# Altium PCB PCB1.PcbDoc
Units mm, origin at the board's own origin, x right, y up, seen from the top; angles counter-clockwise.
Board outline 106 x 106 mm, 4 copper layers (Top Layer, Layer 1, Layer 2, Bottom Layer), stack 2.276 mm thick; 85 components, 55 nets, 394 pads, 308 vias.
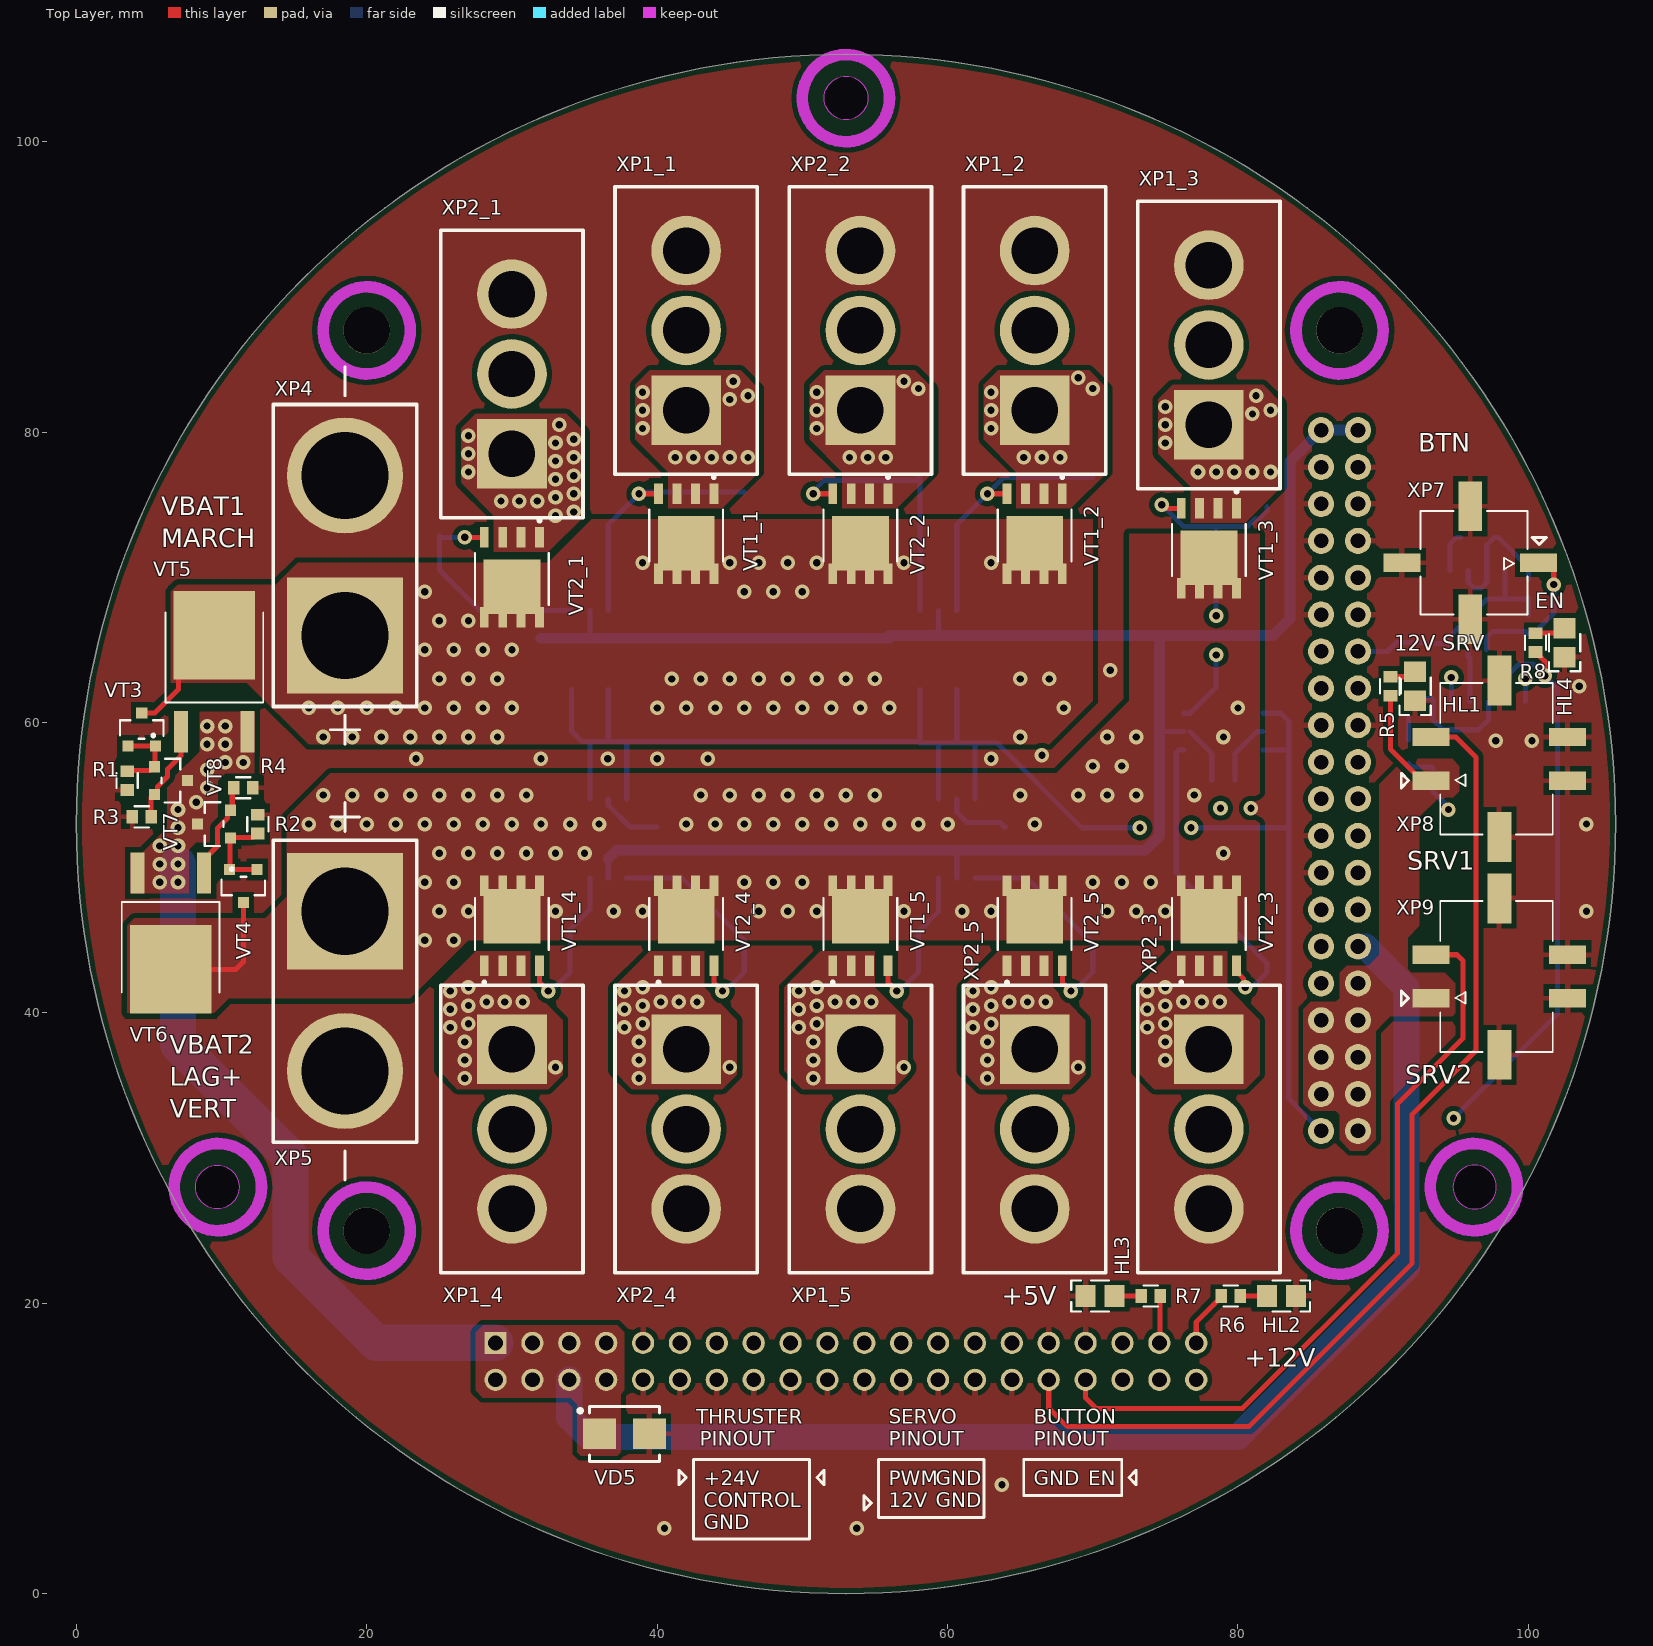
[diagram p0: Top Layer view]
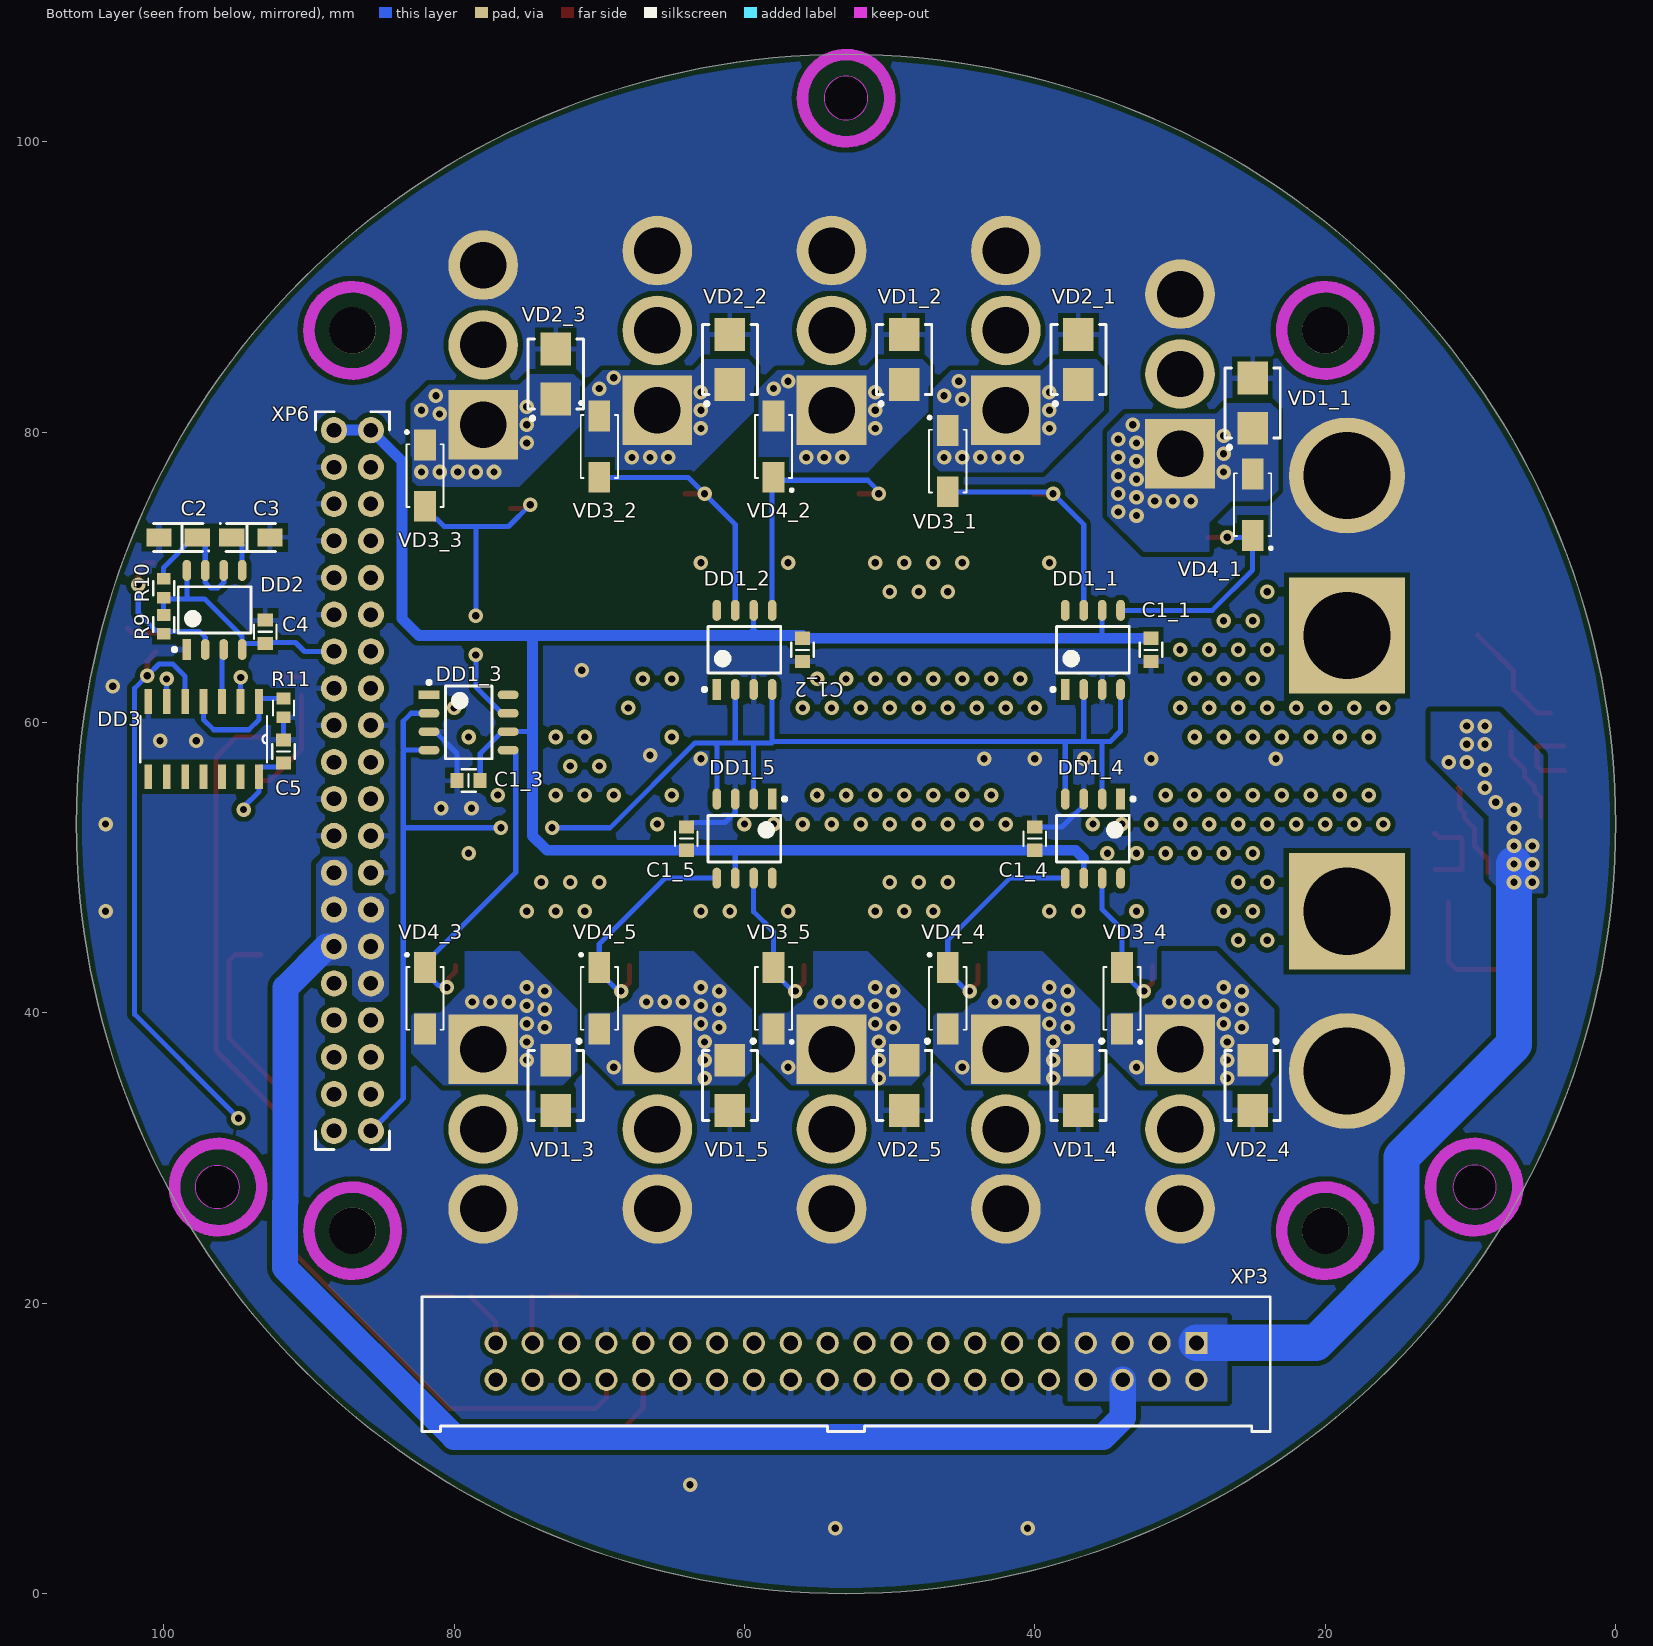
[diagram p1: Bottom Layer view, seen from below]
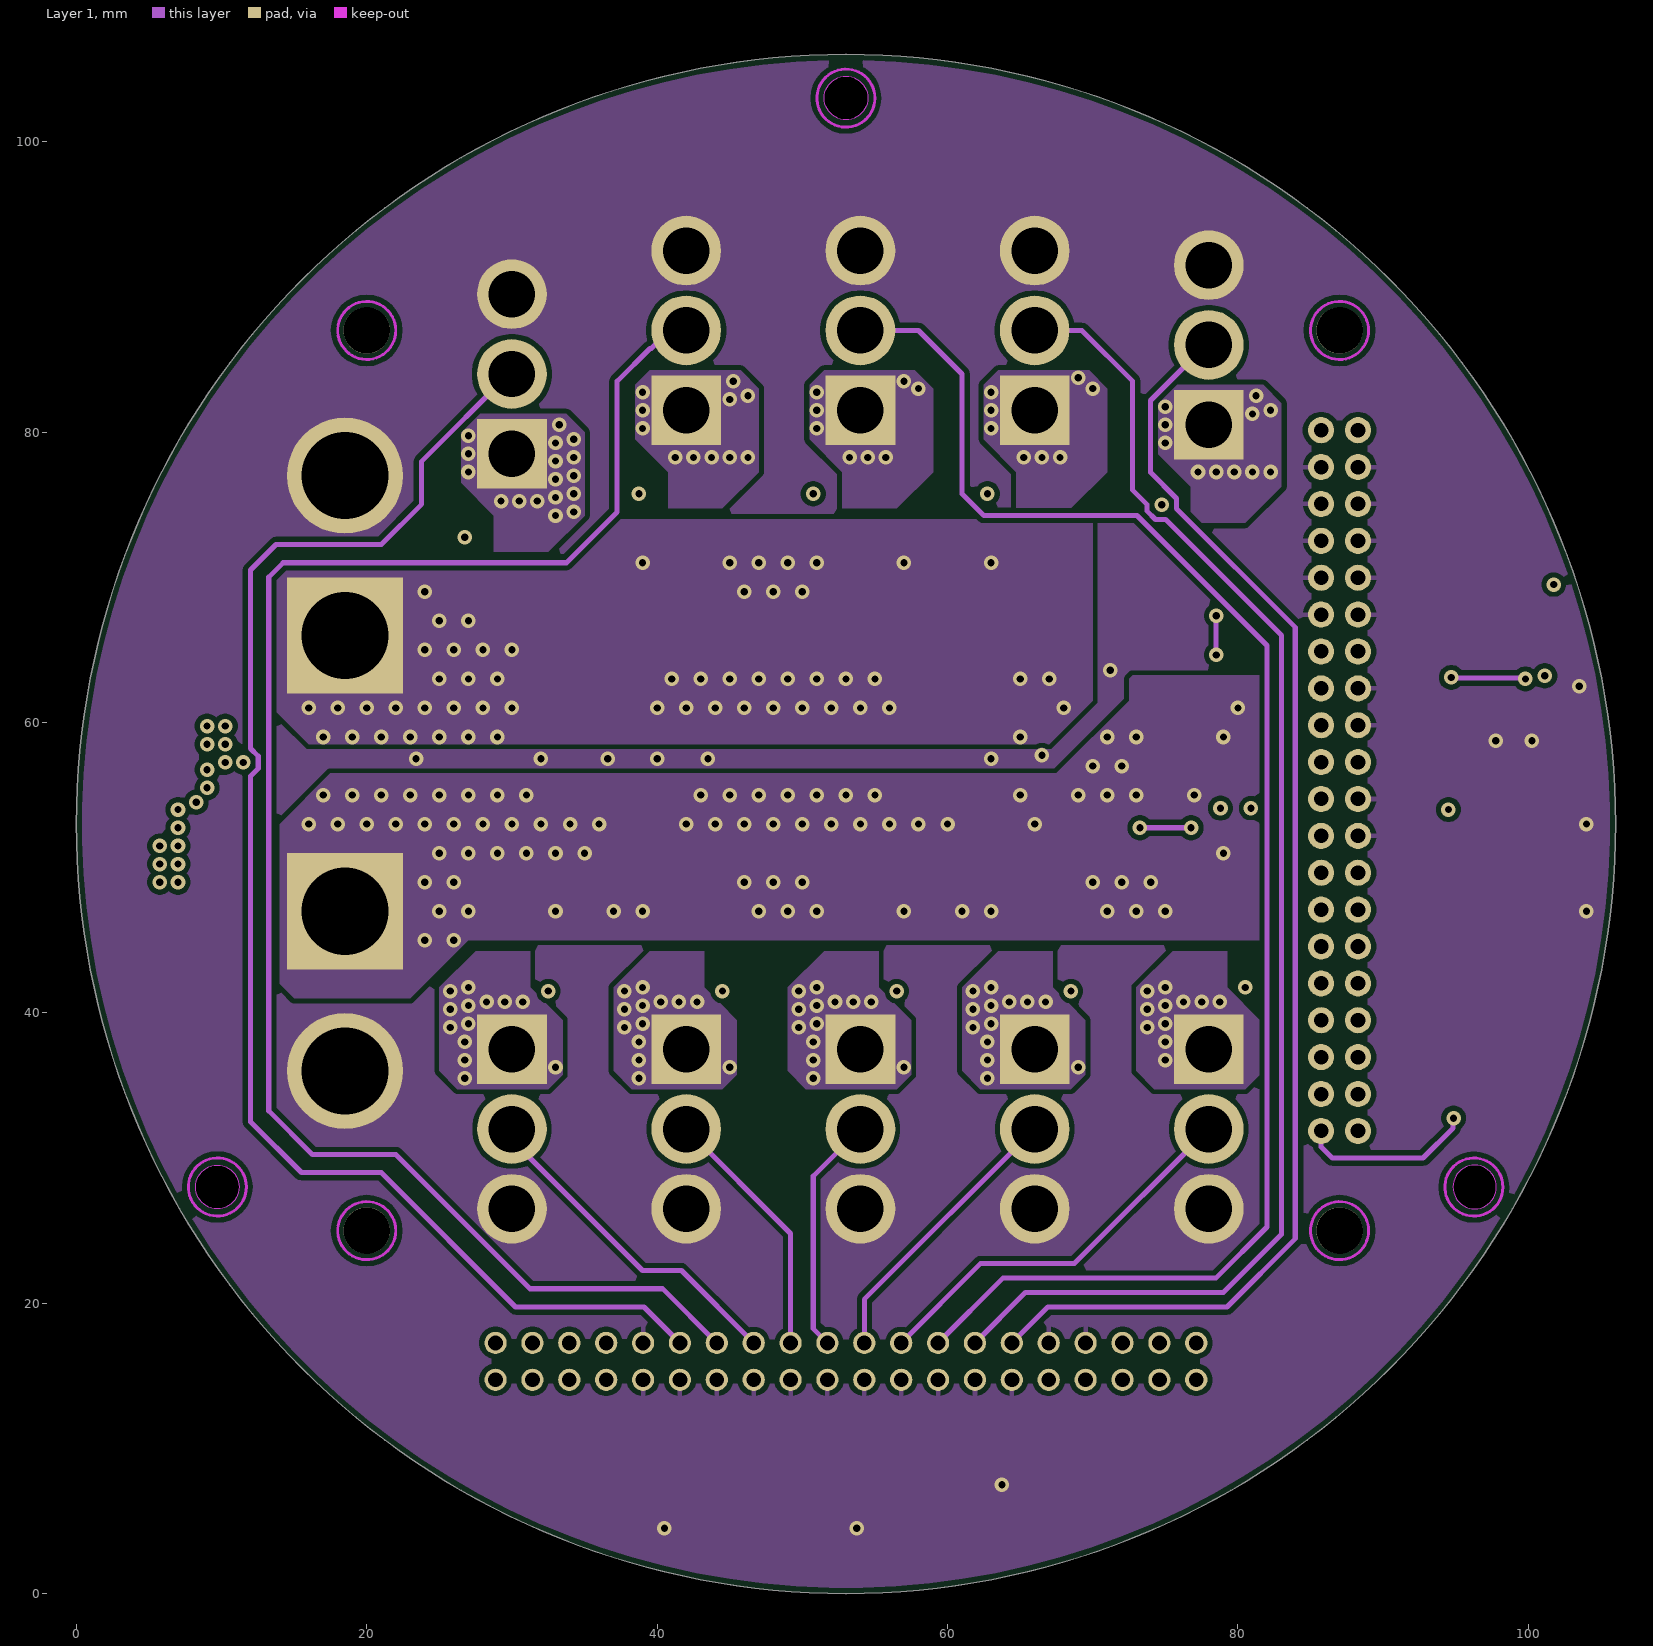
[diagram p2: Layer 1]
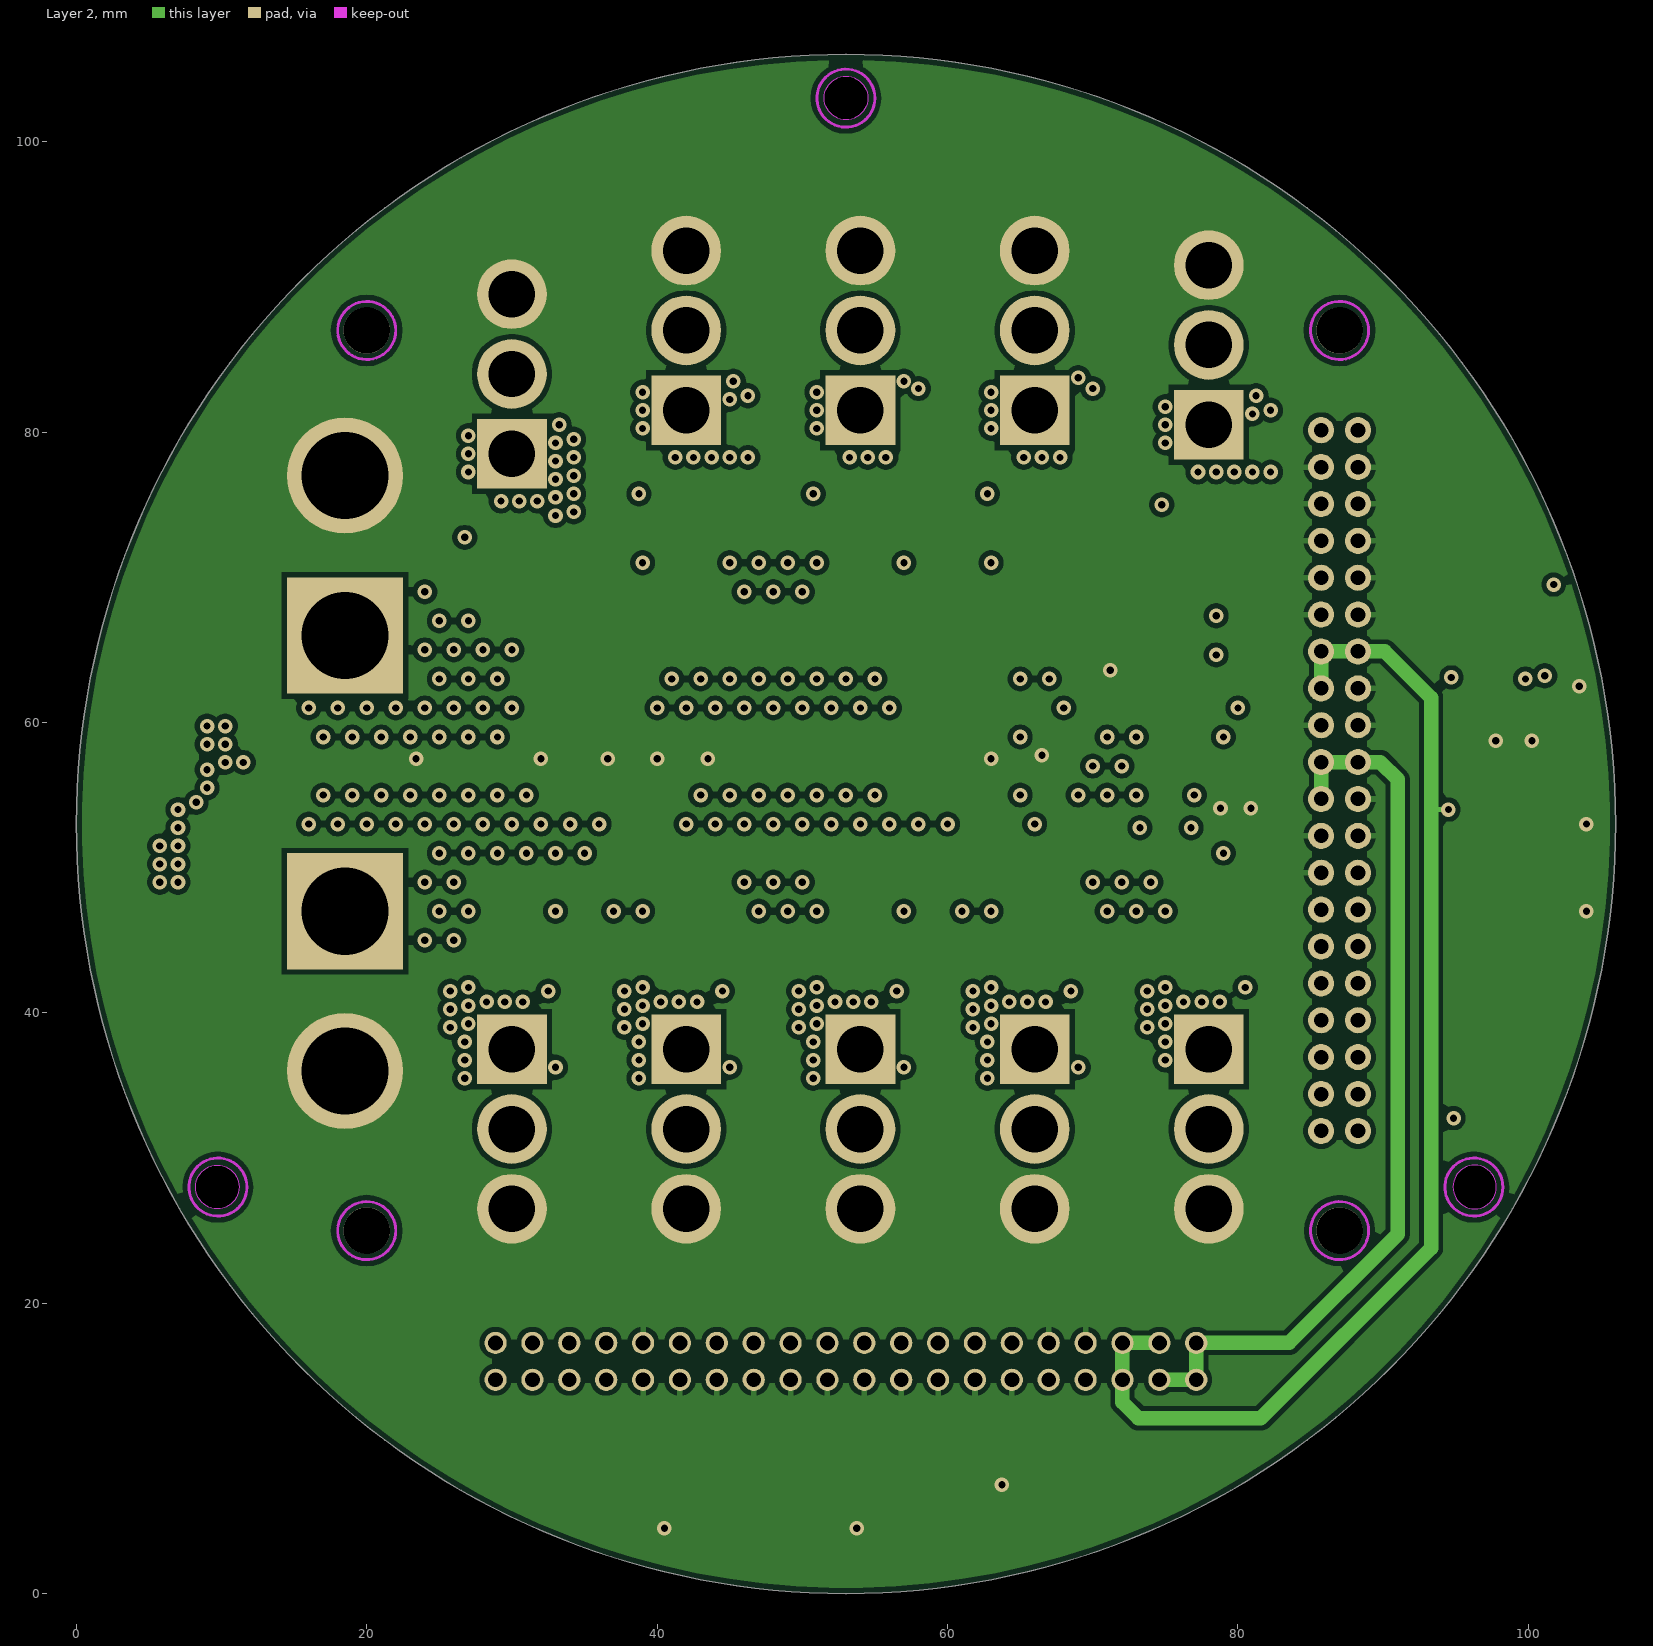
[diagram p3: Layer 2]
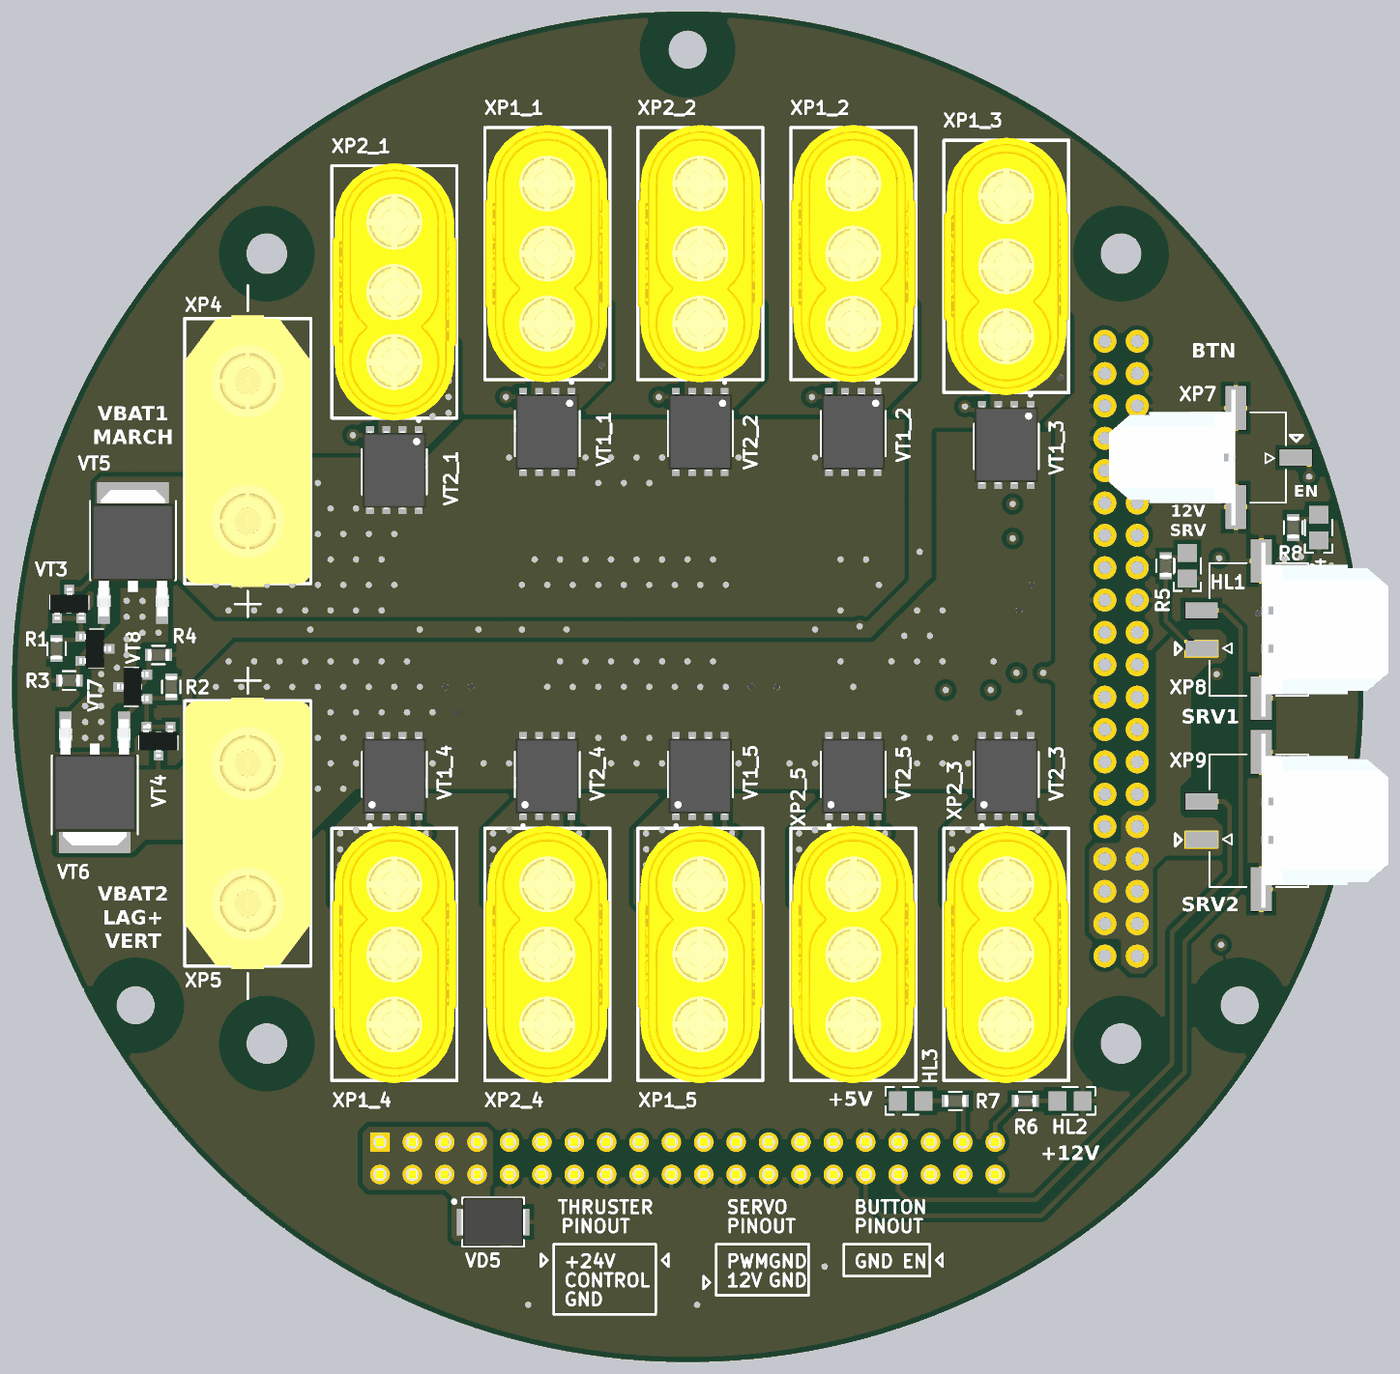
[diagram p4: 3D render of the assembled board from above, using the file's embedded part models]
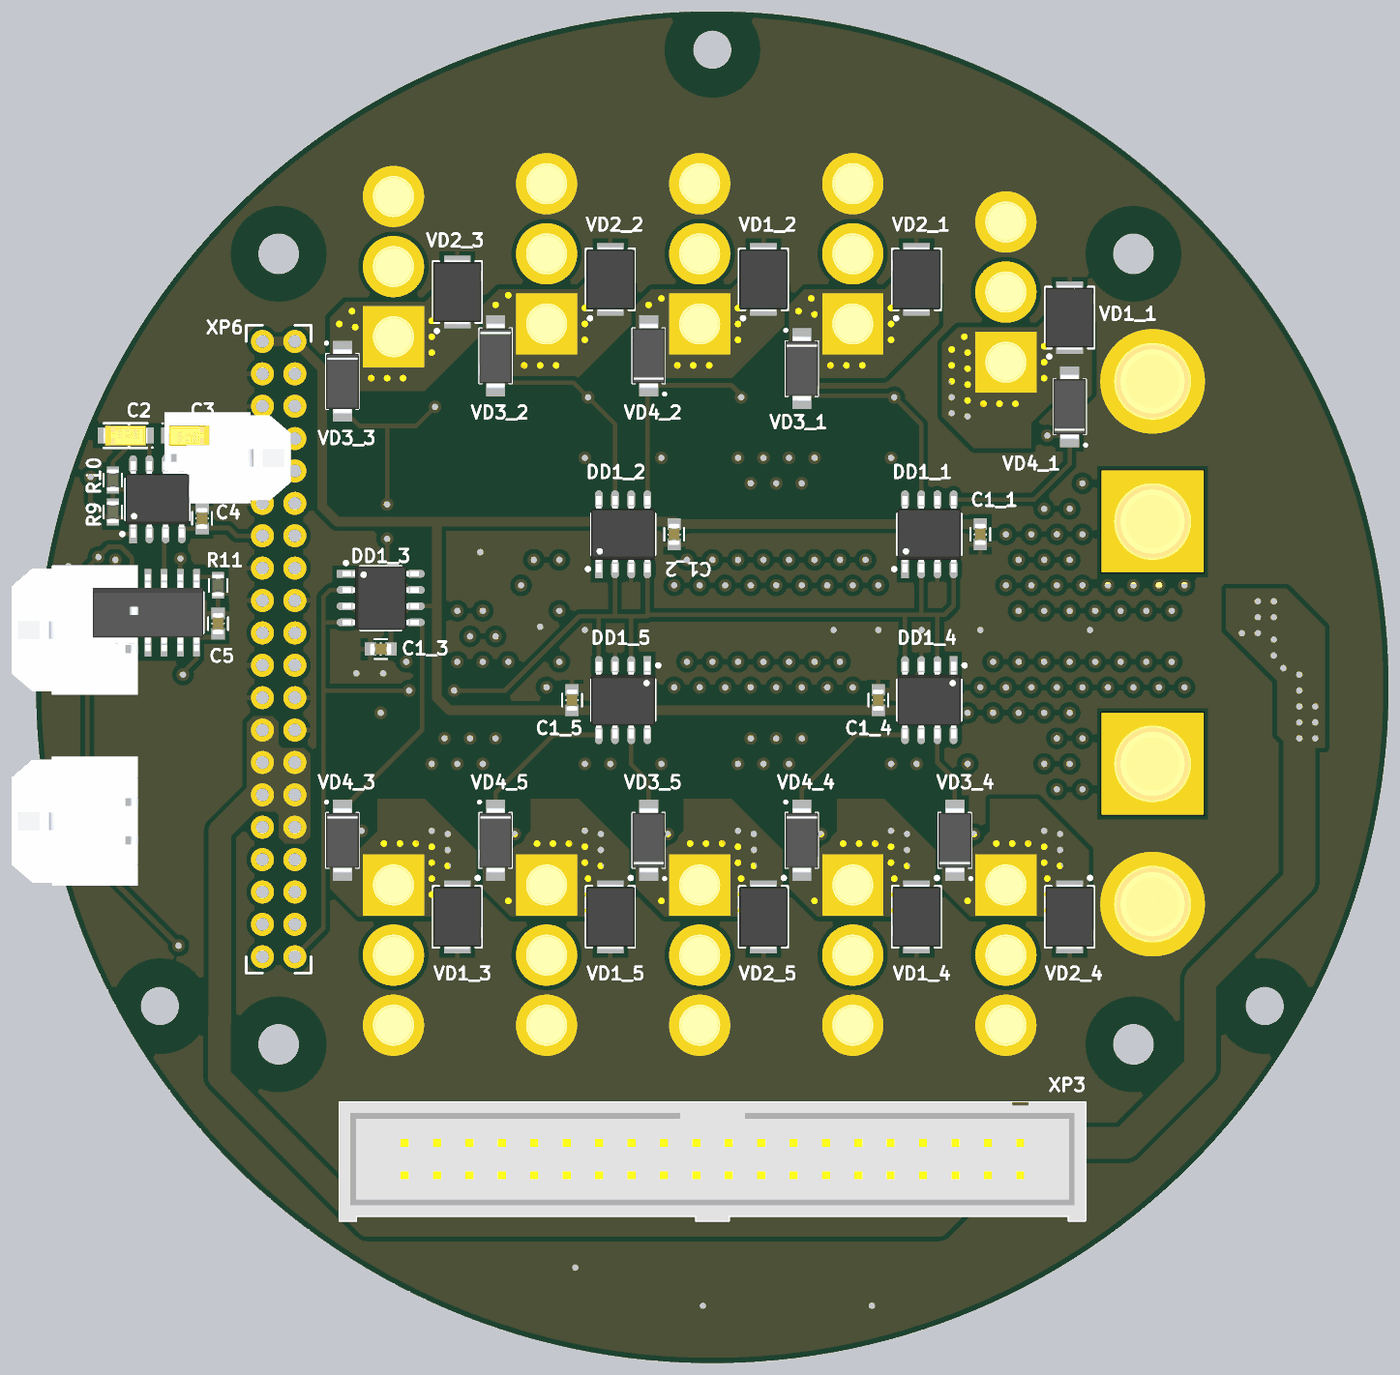
[diagram p5: 3D render of the assembled board from below, using the file's embedded part models]

## Layer stack, top to bottom
Top Solder: solder mask 0.0102, Solder Resist, Dk 3.5
Top Layer: signal copper 0.105
Dielectric 4: prepreg 0.191, FR4 HiTg170, Dk 5.14
Dielectric 6: prepreg 0.191, FR4 HiTg170, Dk 5.14
Dielectric 2: prepreg 0.191, FR4 HiTg170, Dk 5.14
Layer 1: signal copper 0.105
Dielectric 1: core 0.71, FR4 HiTg170, Dk 4.7
Layer 2: signal copper 0.105
Dielectric 3: prepreg 0.191, FR4 HiTg170, Dk 5.14
Dielectric 7: prepreg 0.191, FR4 HiTg170, Dk 5.14
Dielectric 5: prepreg 0.191, FR4 HiTg170, Dk 5.14
Bottom Layer: signal copper 0.105
Bottom Solder: solder mask 0.0102, Solder Resist, Dk 3.5

## Board outline
0.008,53.007 ccw(c53.008,53.007) 53.008,0.007 ccw(c53.008,53.007) 106.008,53.007 ccw(c53.008,53.007) 53.008,106.007 ccw(c53.008,53.007)
cut-out: 53.008,101.507 cw(c53.008,103.007) 51.508,103.007 cw(c53.008,103.007) 53.008,104.507 cw(c53.008,103.007) 54.508,103.007 cw(c53.008,103.007)
cut-out: 8.206,28.007 cw(c9.706,28.007) 9.706,29.507 cw(c9.706,28.007) 11.206,28.007 cw(c9.706,28.007) 9.706,26.507 cw(c9.706,28.007)
cut-out: 94.809,28.007 ccw(c96.309,28.007) 96.309,26.507 ccw(c96.309,28.007) 97.809,28.007 ccw(c96.309,28.007) 96.309,29.507 ccw(c96.309,28.007)

## Design rules (kind name [scope] priority, off if disabled: settings)
AcuteAngle [All] p1: minimum=3.50000000000000E+0001 checktracksonly=FALSE
BoardOutlineClearance "BoardOutlineClearance 2" [All] p1: gap=0.4 ignorepadtopadclearanceinfootprint=FALSE except(0: Arc-SplitContinuation Track-SplitContinuation SMDPad-SplitContinuation THPad-SplitContinuation Via-SplitContinuation Fill-SplitContinuation Poly-SplitContinuation Region-SplitContinuation Text-SplitContinuation) // V-Cut
Clearance "Clearance 3 Oz" [All] p1: gap=0.35 ignorepadtopadclearanceinfootprint=FALSE except(0.25: Arc-Hole Track-Hole SMDPad-Hole THPad-Hole Via-Hole Fill-Hole Poly-Hole Region-Hole Text-Hole)
HoleSize "Minimum HoleSize" [IsPad] p1: absolutevalues=TRUE maxlimit=8 minlimit=0.6 maxpercent=80.000 minpercent=20.000
HoleSize "Minimum HoleSize VIA 1" [IsVia] p2: absolutevalues=TRUE maxlimit=5.9 minlimit=0.3 maxpercent=80.000 minpercent=20.000 // Standart
HoleToHoleClearance Hole2HoleClearance [All] p1: gap=0.25 allowstackedmicrovias=FALSE
MinimumAnnularRing "Minimum AR VIA Standart" [IsVia] p1: minimumring=0.15
MinimumAnnularRing "Minimum AR PAD Standart" [IsPAD] p2: minimumring=0.2
MinimumAnnularRing "Minimum AR VIA Advance" [IsVia] p3: minimumring=0.1
MinimumAnnularRing "Minimum AR PAD Advance" [IsPAD] p4: minimumring=0.15
MinimumSolderMaskSliver "SolderMask Bridge Standart" [All] p1: minsoldermaskwidth=0.15 // All Masks
PlaneClearance "PlaneClearance 3 Oz" [All] p1: clearance=0.35
PlaneConnect "TermalConnect 3 Oz" [All] p1: planeconnectstyle=Relief reliefexpansion=0.2 reliefentries=4 reliefconductorwidth=0.35 reliefairgap=0.35 // Standart
PolygonConnect Thermal_relief [InNet('GND')] p1: thpad.connectstyle=Relief thpad.reliefconductorwidth=0.35 thpad.reliefentries=4 thpad.polygonreliefangle="90 Angle" thpad.airgapwidth=0.35 smdpad.connectstyle=Relief smdpad.reliefconductorwidth=0.35 smdpad.reliefentries=4 smdpad.polygonreliefangle="90 Angle" smdpad.airgapwidth=0.35 via.connectstyle=Direct via.reliefconductorwidth=0.254 via.reliefentries=4 via.polygonreliefangle="90 Angle" via.airgapwidth=0.254
PolygonConnect Direct [All] p2: connectstyle=Direct reliefconductorwidth=0.254 reliefentries=4 polygonreliefangle="90 Angle" airgapwidth=0.254
RoutingCorners [All] p1 off: cornerstyle=45-Degree minsetback=2.54 maxsetback=2.54
RoutingVias [All] p1: holewidth=0.5 width=1 viastyle="Through Hole" minholewidth=0.3 minwidth=0.6 maxholewidth=8 maxwidth=7
SilkToSilkClearance Silk2SilkClearance [All] p1 off: silktosilkclearance=0.15
SilkToSolderMaskClearance Silk2SolderMaskClearance [IsPad] p1 off: minsilkscreentomaskgap=0.15 clearancetoexposedcopper=TRUE
SolderMaskExpansion "SolderMaskExpansion LDI" [IsVia] p1: expansion=0.025 istentingtop=TRUE // Advance
SupplyNets "Schematic Supply Nets_7" [InNet('GND')] p1: voltage=0.000
SupplyNets "Schematic Supply Nets_6" [InNet('+24В_АКБ1')] p2: voltage=0.000
SupplyNets "Schematic Supply Nets_5" [InNet('+5В')] p3: voltage=0.000
SupplyNets "Schematic Supply Nets_4" [InNet('+12В_servo')] p4: voltage=0.000
SupplyNets "Schematic Supply Nets_3" [InNet('+24В')] p5: voltage=0.000
SupplyNets "Schematic Supply Nets_2" [InNet('+24В_АКБ2')] p6: voltage=0.000
SupplyNets "Schematic Supply Nets_1" [InNet('+12В')] p7: voltage=0.000
SupplyNets "Schematic Supply Nets" [InNet('+35В')] p8: voltage=0.000
UnRoutedNet [All] p1: checkbadconnections=TRUE
Width "Width 3 Oz" [All] p1: maxlimit=10 minlimit=0.35 preferedwidth=0.4 checkconnectedcopper=TRUE
21 further rules are at their usual default settings.

## Classes and differential pairs
component class 3: C1_3 DD1_3 VD1_3 VD2_3 VD3_3 VD4_3 VT1_3 VT2_3 XP1_3 XP2_3
net class DSHOT2_[1..5]: DSHOT2_1 DSHOT2_2 DSHOT2_3 DSHOT2_4 DSHOT2_5
net class DSHOT1_[1..5]: DSHOT1_1 DSHOT1_2 DSHOT1_3 DSHOT1_4 DSHOT1_5
channel class Transistors: 1 2 3 4 5
component class 5: C1_5 DD1_5 VD1_5 VD2_5 VD3_5 VD4_5 VT1_5 VT2_5 XP1_5 XP2_5
component class 4: C1_4 DD1_4 VD1_4 VD2_4 VD3_4 VD4_4 VT1_4 VT2_4 XP1_4 XP2_4
component class 2: C1_2 DD1_2 VD1_2 VD2_2 VD3_2 VD4_2 VT1_2 VT2_2 XP1_2 XP2_2
component class 1: C1_1 DD1_1 VD1_1 VD2_1 VD3_1 VD4_1 VT1_1 VT2_1 XP1_1 XP2_1
component class KillSwitch: C2 C3 C4 C5 DD2 DD3 R9 R10 R11
component class Connectors: 32 HL1 HL2 HL3 HL4 R1 R2 R3 R4 R5 R6 R7 R8 VD5 VT3 VT4 VT5 VT6 VT7 VT8 XP3 XP4 XP5 XP6 XP7 XP8 XP9

## Components (designator, comment, footprint, x,y, rotation, side; value= is the part's Value field where it differs from the comment)
C1_1 "Capacitor" 0603C 32,65 r90 bottom value="0,1 мк" (schematic designator C1)
C1_2 "Capacitor" 0603C 56,65 r90 bottom value="0,1 мк" (schematic designator C1)
C1_3 "Capacitor" 0603C 79,56 r180 bottom value="0,1 мк" (schematic designator C1)
C1_4 "Capacitor" 0603C 40,52 r270 bottom value="0,1 мк" (schematic designator C1)
C1_5 "Capacitor" 0603C 64,52 r270 bottom value="0,1 мк" (schematic designator C1)
C2 "Capacitor" TC_A 99,72.75 r0 bottom value="22 мк"
C3 "Capacitor" TC_A 94,72.75 r180 bottom value="10 мк"
C4 "Capacitor" 0603C 93,66.25 r270 bottom value="0,1 мк"
C5 "Capacitor" 0603C 91.75,58 r90 bottom value="0,1 мк"
DD1_1 "IXDN602" SOIC-8 36,65 r90 bottom (schematic designator DD1)
DD1_2 "IXDN602" SOIC-8 60,65 r90 bottom (schematic designator DD1)
DD1_3 "IXDN602" SOIC-8 79,60 r180 bottom (schematic designator DD1)
DD1_4 "IXDN602" SOIC-8 36,52 r270 bottom (schematic designator DD1)
DD1_5 "IXDN602" SOIC-8 60,52 r270 bottom (schematic designator DD1)
DD2 "LMC555" SOIC-8 96.5,67.75 r90 bottom
DD3 "74HC74D,653" SOIC-14 97.25,58.85 r270 bottom
HL1 "LED" 0805D 92.2,62.5 r270 top
HL2 "LED" 0805D 83,20.5 r0 top
HL3 "LED" 0805D 70.5,20.5 r180 top
HL4 "LED" 0805D 102.5,65.5 r270 top
R1 "Resistor" 0603R 3.5,56 r90 top value="33 к"
R2 "Resistor" 0603R 12.5,53 r270 top value="33 к"
R3 "Resistor" 0603R 4.5,53.5 r0 top value="33 к"
R4 "Resistor" 0603R 11.5,55.5 r180 top value="33 к"
R5 "Resistor" 0603R 90.5,62.5 r270 top value="10 к"
R6 "Resistor" 0603R 79.5,20.5 r180 top value="10 к"
R7 "Resistor" 0603R 74,20.5 r0 top value="2,2 к"
R8 "Resistor" 0603R 100.5,65.5 r270 top value="2,2 к"
R9 "Resistor" 0603R 100,66.75 r90 bottom value="10 к"
R10 "Resistor" 0603R 100,69.25 r270 bottom value="10 к"
R11 "Resistor" 0603R 91.75,61 r90 bottom value="10 к"
VD1_1 "SMBJ24A" SMB 25,82 r90 bottom value="24 В" (schematic designator VD1)
VD1_2 "SMBJ24A" SMB 49,85 r90 bottom value="24 В" (schematic designator VD1)
VD1_3 "SMBJ24A" SMB 73,35 r270 bottom value="24 В" (schematic designator VD1)
VD1_4 "SMBJ24A" SMB 37,35 r270 bottom value="24 В" (schematic designator VD1)
VD1_5 "SMBJ24A" SMB 61,35 r270 bottom value="24 В" (schematic designator VD1)
VD2_1 "SMBJ24A" SMB 37,85 r90 bottom value="24 В" (schematic designator VD2)
VD2_2 "SMBJ24A" SMB 61,85 r90 bottom value="24 В" (schematic designator VD2)
VD2_3 "SMBJ24A" SMB 73,84 r90 bottom value="24 В" (schematic designator VD2)
VD2_4 "SMBJ24A" SMB 25,35 r270 bottom value="24 В" (schematic designator VD2)
VD2_5 "SMBJ24A" SMB 49,35 r270 bottom value="24 В" (schematic designator VD2)
VD3_1 "SMAJ12CA" SMA 46,78 r270 bottom value="12 В" (schematic designator VD3)
VD3_2 "SMAJ12CA" SMA 70,79 r270 bottom value="12 В" (schematic designator VD3)
VD3_3 "SMAJ12CA" SMA 82,77 r270 bottom value="12 В" (schematic designator VD3)
VD3_4 "SMAJ12CA" SMA 34,41 r90 bottom value="12 В" (schematic designator VD3)
VD3_5 "SMAJ12CA" SMA 58,41 r90 bottom value="12 В" (schematic designator VD3)
VD4_1 "SMAJ12CA" SMA 25,75 r90 bottom value="12 В" (schematic designator VD4)
VD4_2 "SMAJ12CA" SMA 58,79 r90 bottom value="12 В" (schematic designator VD4)
VD4_3 "SMAJ12CA" SMA 82,41 r270 bottom value="12 В" (schematic designator VD4)
VD4_4 "SMAJ12CA" SMA 46,41 r270 bottom value="12 В" (schematic designator VD4)
VD4_5 "SMAJ12CA" SMA 70,41 r270 bottom value="12 В" (schematic designator VD4)
VD5 "SMBJ24A" SMB 37.75,11 r0 top value="24 В"
VT1_1 "IRFH7084" PQFN_5x6 42,73 r270 top (schematic designator VT1)
VT1_2 "IRFH7084" PQFN_5x6 66,73 r270 top (schematic designator VT1)
VT1_3 "IRFH7084" PQFN_5x6 78,72 r270 top (schematic designator VT1)
VT1_4 "IRFH7084" PQFN_5x6 30,46 r90 top (schematic designator VT1)
VT1_5 "IRFH7084" PQFN_5x6 54,46 r90 top (schematic designator VT1)
VT2_1 "IRFH7084" PQFN_5x6 30,70 r270 top (schematic designator VT2)
VT2_2 "IRFH7084" PQFN_5x6 54,73 r270 top (schematic designator VT2)
VT2_3 "IRFH7084" PQFN_5x6 78,46 r90 top (schematic designator VT2)
VT2_4 "IRFH7084" PQFN_5x6 42,46 r90 top (schematic designator VT2)
VT2_5 "IRFH7084" PQFN_5x6 66,46 r90 top (schematic designator VT2)
VT3 "BC857" SOT23-3 4.5,59.5 r90 top
VT4 "BC857" SOT23-3 11.5,48.75 r270 top
VT5 "IPD90P04P405" DPAK 9.5,63.5 r0 top
VT6 "IPD90P04P405" DPAK 6.5,45.5 r180 top
VT7 "BC857" SOT23-3 6.5,56 r0 top
VT8 "BC857" SOT23-3 9.5,53 r180 top
XP1_1 "MR60PB-M" MR60PB-M 42,87 r270 top (schematic designator XP1)
XP1_2 "MR60PB-M" MR60PB-M 66,87 r270 top (schematic designator XP1)
XP1_3 "MR60PB-M" MR60PB-M 78,86 r270 top (schematic designator XP1)
XP1_4 "MR60PB-M" MR60PB-M 30,32 r90 top (schematic designator XP1)
XP1_5 "MR60PB-M" MR60PB-M 54,32 r90 top (schematic designator XP1)
XP2_1 "MR60PB-M" MR60PB-M 30,84 r270 top (schematic designator XP2)
XP2_2 "MR60PB-M" MR60PB-M 54,87 r270 top (schematic designator XP2)
XP2_3 "MR60PB-M" MR60PB-M 78,32 r90 top (schematic designator XP2)
XP2_4 "MR60PB-M" MR60PB-M 42,32 r90 top (schematic designator XP2)
XP2_5 "MR60PB-M" MR60PB-M 66,32 r90 top (schematic designator XP2)
XP3 "IDC_40_Male conector" "IDC_40_Male conector" 53,16 r0 bottom
XP4 "XT90PB-M" XT90PB-M 18.5,71 r90 top
XP5 "XT90PB-M" XT90PB-M 18.5,42 r270 top
XP6 "PBD-40" DCDC_SAUVC26 87,56 r270 bottom
XP7 "430450218" Molex_430450218 96,71 r90 top
XP8 "430450418" MOLEX_430450418 98,57.5 r270 top
XP9 "430450418" MOLEX_430450418 98,42.5 r270 top

## Footprints (in the part's own frame and the unit in brackets; to place one, negate y for a bottom-side part, rotate by r counter-clockwise, add the part's x,y. Pads: shape width x height; smd on the part's side, far side on the other; paste and mask are expansions set on the pad)
0603C [mm] "Chip Resistor, 2-Leads, Body 1,40x0,80mm, IPC Medium Density"
  rect 0.9x1.05 smd: 1(-0.8,0) 2(0.8,0)
  silkscreen extent -0.5,-0.77 0.5,0.77, body extent -0.85,-0.45 0.85,0.45, height 0.9
0603R [mm] "Chip Resistor, 2-Leads, Body 1.60x0.85mm, IPC Medium Density"
  rect 0.8x0.95 smd: 1(-0.65,0) 2(0.65,0)
  silkscreen extent -0.5,-0.72 0.5,0.72, body extent -0.87,-0.47 0.88,0.48, height 0.9
0805D [mm]
  rect 1.4x1.5 smd: 1(-1,0) 2(1,0)
  silkscreen extent -0.6,-1.07 1.97,1.07, body extent -1.07,-0.7 1.07,0.7, height 0.7
DCDC_SAUVC26 [mm]
  round 1.8 hole 1: 1(-24.13,1.27) 2(-24.13,-1.27) 3(-21.59,1.27) 4(-21.59,-1.27) 5(-19.05,1.27) 6(-19.05,-1.27) 7(-16.51,1.27) 8(-16.51,-1.27) 9(-13.97,1.27) 10(-13.97,-1.27) 11(-11.43,1.27) 12(-11.43,-1.27) 13(-8.89,1.27) 14(-8.89,-1.27) 15(-6.35,1.27) 16(-6.35,-1.27) 17(-3.81,1.27) 18(-3.81,-1.27) 19(-1.27,1.27) 20(-1.27,-1.27) 21(1.27,1.27) 22(1.27,-1.27) 23(3.81,1.27) 24(3.81,-1.27) 25(6.35,1.27) 26(6.35,-1.27) 27(8.89,1.27) 28(8.89,-1.27) 29(11.43,1.27) 30(11.43,-1.27) 31(13.97,1.27) 32(13.97,-1.27) 33(16.51,1.27) 34(16.51,-1.27) 35(19.05,1.27) 36(19.05,-1.27) 37(21.59,1.27) 38(21.59,-1.27) 39(24.13,1.27) 40(24.13,-1.27)
  round 3.2 hole 3.2 unplated: NC(-31,0) NC(-31,67) NC(31,0) NC(31,67)
  silkscreen extent -25.4,-2.54 25.4,2.54, body extent -35,-4 35,71, height 17.5
DPAK [mm]
  rect 0.97x2.83 smd: 1(-2.29,-4.14) 3(2.29,-4.14)
  rect 5.63x6.09 smd: 2(0,2.51)
  silkscreen extent -4.3,-4.5 3.37,4.09, body extent -3.27,-4.96 3.27,4.96, height 2.39
"IDC_40_Male conector" [mm] "Connector; IDC"
  rect 1.53x1.53 / inner round 1.53 / far side rect 1.53x1.53 hole 1.02: 1(-24.13,-1.27)
  round 1.53 hole 1.02: 2(-24.13,1.27) 3(-21.59,-1.27) 4(-21.59,1.27) 5(-19.05,-1.27) 6(-19.05,1.27) 7(-16.51,-1.27) 8(-16.51,1.27) 9(-13.97,-1.27) 10(-13.97,1.27) 11(-11.43,-1.27) 12(-11.43,1.27) 13(-8.89,-1.27) 14(-8.89,1.27) 15(-6.35,-1.27) 16(-6.35,1.27) 17(-3.81,-1.27) 18(-3.81,1.27) 19(-1.27,-1.27) 20(-1.27,1.27) 21(1.27,-1.27) 22(1.27,1.27) 23(3.81,-1.27) 24(3.81,1.27) 25(6.35,-1.27) 26(6.35,1.27) 27(8.89,-1.27) 28(8.89,1.27) 29(11.43,-1.27) 30(11.43,1.27) 31(13.97,-1.27) 32(13.97,1.27) 33(16.51,-1.27) 34(16.51,1.27) 35(19.05,-1.27) 36(19.05,1.27) 37(21.59,-1.27) 38(21.59,1.27) 39(24.13,-1.27) 40(24.13,1.27)
  silkscreen extent -29.21,-4.45 29.21,4.83, body extent -29.21,-4.45 29.21,4.83, height 8.89
Molex_430450218 [mm]
  rect 3.43x1.65 smd mask+0.076: 0(-3.885,0) 0(3.885,0)
  rect 1.27x2.54 smd mask+0.076: 1(0,-4.7) 2(0,4.7)
  silkscreen extent -3.56,-3.94 3.56,3.43, body extent -5.32,-5.6 5.33,5.6, height 9.96
MOLEX_430450418 [mm]
  rect 3.43x1.65 smd mask+0.076: 0(-5.385,0) 0(5.385,0)
  rect 1.27x2.54 smd mask+0.076: 1(1.5,-4.7) 2(-1.5,-4.7) 3(1.5,4.7) 4(-1.5,4.7)
  silkscreen extent -5.21,-4.06 5.21,3.68, body extent -6.82,-5.6 6.83,5.6, height 9.96
MR60PB-M [mm]
  rect 4.8x4.8 hole 3.2: 1(5.5,0)
  round 4.8 hole 3.2: 2(0,0) 3(-5.5,0)
  silkscreen extent -9.9,-4.9 9.9,4.9, body extent -10.1,-4.9 10.1,4.9, height 14.19
PQFN_5x6 [mm]
  rect 1.42x0.61 smd: 1(-2.745,1.905) 2(-2.745,0.635) 3(-2.745,-0.635) 4(-2.745,-1.905) 5(2.745,-1.905) 6(2.745,-0.635) 7(2.745,0.635) 8(2.745,1.905)
  rect 3.75x3.91 smd paste-3: 8(0.66,0)
  silkscreen extent -4,-2.54 1.91,2.54, body extent -3.04,-2.51 3.04,2.51, height 1.17
SMA [mm]
  rect 2.12x1.5 smd: 1(2.115,0) 2(-2.115,0)
  silkscreen extent -3.1,-1.35 2.16,1.28, body extent -2.57,-1.28 2.57,1.28, height 2.5
SMB [mm] "Diod"
  rect 2.25x2.1 smd: 1(1.725,0) 2(-1.725,0)
  silkscreen extent -3.17,-1.9 2.4,1.9, body extent -2.57,-1.9 2.57,1.9, height 2.4
SOIC-8 [mm] "for operational amplifier"
  rect 1.45x0.6 smd: 1(-2.725,1.905)
  oval 1.45x0.6 smd: 2(-2.725,0.635) 3(-2.725,-0.635) 4(-2.725,-1.905) 5(2.725,-1.905) 6(2.725,-0.635) 7(2.725,0.635) 8(2.725,1.905)
  silkscreen extent -2.85,-2.5 1.6,2.88, body extent -3,-2.5 3,2.5, height 1.75
SOIC-14 [mil]
  rect 67x21 smd: 1(-102,150) 2(-102,100) 3(-102,50) 4(-102,0) 5(-102,-50) 6(-102,-100) 7(-102,-150) 8(102,-150) 9(102,-100) 10(102,-50) 11(102,0) 12(102,50) 13(102,100) 14(102,150)
  silkscreen extent -63,-172 63,172, body extent -118,-170 118,170, height 69
SOT23-3 [mil]
  rect 30x30 smd: 1(-44.29,37.4) 2(-44.29,-37.6) 3(45.71,-0.1)
  silkscreen extent -25,-59 26,59, body extent -48,-60 50,59, height 41
TC_A [mm] "Tantalum capacitor, type A,  1 pin - plus"
  rect 1.75x1.25 smd: 1(-1.325,0) 2(1.325,0)
  silkscreen extent -2.15,-0.97 1.7,1, body extent -1.73,-0.8 1.73,0.8, height 1.64
XT90PB-M [mm]
  round 8 hole 6 mask+0.102: N(6,0)
  rect 8x8 hole 6 mask+0.102: P(-5,0)
  silkscreen extent -12.5,-4.95 13.5,4.95, body extent -10.15,-4.95 11.15,4.95, height 20.7

## Part data
C1_1 C1_2 C1_3 C1_4 C1_5 C4 C5: library part Capacitor_0,1u_10_50V_X7R_0603C, "Конденсатор", Capacity (nF)=100, Dielectric=X7R, Tolerance=0,1, Voltage (V)=50, Library Path2=Schematic\Capacitor.SchLib, Part Number=Capacitor_0,1u_10_50V_X7R_0603C
C2: library part Capacitor_22u_10_50V_TC_A, "Танталовый конденсатор", Capacity (uF)=22, Tolerance=0,1, Voltage (V)=50, Part Number=Capacitor_22u_10_50V_TC_A, Type=Tantalum
C3: library part Capacitor_10u_10_50V_TC_A, "Танталовый конденсатор", Capacity (uF)=10, Tolerance=0,1, Voltage (V)=50, Part Number=Capacitor_10u_10_50V_TC_A, Type=Tantalum
DD1_1 DD1_2 DD1_3 DD1_4 DD1_5: "Двухканальный драйвер затвора для mosfet и igbt транзисторов", Part Number=IXDN602
DD2: "Таймер интегральный прецизионный КМОП", Part Number=LMC555
DD3: "Два триггера D-типа", Package="SO14-14 Nexperia USA Inc.", Check_prices=https://www.snapeda.com/parts/74HC74D,653/Nexperia/view-part/?ref=eda, MF="Nexperia USA", MP=74HC74D,653, Part Number=74HC74D,653, SnapEDA_Link=https://www.snapeda.com/parts/74HC74D,653/Nexperia/view-part/?ref=snap
HL1 HL2 HL3 HL4: "Светодиод", Color={Цвет}, Part Number=LED
R1 R2 R3 R4: library part Resistor_33k_1_0603, "Резистор номиналом 33 кОм и точностью 1%", Tolerance=1%, Part Number=Resistor_33k_1_0603
R5 R6 R9 R10 R11: library part Resistor_10k_1_0603, "Резистор номиналом 10 кОм и точностью 1%", Tolerance=1%, Part Number=Resistor_10k_1_0603
R7 R8: library part Resistor_2.2k_1_0603, "Резистор номиналом 2,2 кОм и точностью 1%", Tolerance=1%, Part Number=Resistor_2.2k_1_0603
VD1_1 VD1_2 VD1_3 VD1_4 VD1_5 VD2_1 VD2_2 VD2_3 VD2_4 VD2_5 VD5: "Защитный диод на 24 В, рассеиваемая мощность 600 Вт", Power (W)=600, Voltage nominal (V)=24, Part Number=SMBJ24A
VD3_1 VD3_2 VD3_3 VD3_4 VD3_5 VD4_1 VD4_2 VD4_3 VD4_4 VD4_5: "Защитный диод на 12 В, рассеиваемая мощность 400 Вт", Power (W)=400, Voltage nominal (V)=12, Part Number=SMAJ12CA
VT1_1 VT1_2 VT1_3 VT1_4 VT1_5 VT2_1 VT2_2 VT2_3 VT2_4 VT2_5: "N-канальный MOSFET", Part Number=IRFH7084, Напряжение С-И/К-Э="40 В", Ток макс#="100 А"
VT3 VT4 VT7 VT8: "Биполярный транзистор PNP 45В 0.1А 0.25Вт", Part Number=BC857, Напряжение С-И/К-Э="45 В", Ток макс#="0.1 А"
VT5 VT6: "P-канальный MOSFET", Part Number=IPD90P04P405, Напряжение С-И/К-Э="40 В", Ток макс#="90 А"
XP1_1 XP1_2 XP1_3 XP1_4 XP1_5 XP2_1 XP2_2 XP2_3 XP2_4 XP2_5: "60 А (40 продолжительно), 3 контакта, прямой отец", Value1={Value1}, Value2={Value2}, Value3={Value3}, Part Number=MR60PB-M, System=Connector
XP3: "IDC 40-пиновый разъём прямая вилка", Value1=+24В, Value5=GND, Value6=DSHOT, Value18=+5В, Value20=+12В, Part Number="IDC_40_Male conector", System=Connector, Value2=+24В, Value3=+24В, Value4=+24В, Value7=DSHOT, Value8=DSHOT, Value9=DSHOT, Value10=DSHOT, Value11=DSHOT, Value12=DSHOT, Value13=DSHOT, Value14=DSHOT, Value15=DSHOT, Value16=GND, Value17=GND, Value19=+5В
XP4: "90 А (60 продолжительно), 2 контакта, прямой отец", Value1=+АКБ1, Value2=общий, Part Number=XT90PB-M, System=Connector
XP5: "90 А (60 продолжительно), 2 контакта, прямой отец", Value1=+АКБ2, Value2=общий, Part Number=XT90PB-M, System=Connector
XP6: library part DCDC_SAUVC26, "Плата DCDC преобрахователей", Value1=+35В, Value2=GND, Value7=+5В, Value10=+12В, Value14=+24В, Value17=+12В_servo, Value20=Enable, Value3=GND, Value4=GND, Value5=GND, Value6=GND, Value8=+5В, Value9=GND, Value11=+12В, Value12=GND, Value13=GND, Value15=+24В, Value16=+24В, Value18=+12В_servo, Value19=+12В_servo
XP7: library part Molex_430450218, "Разъем типа провод-плата, 3 мм, 2 контакт(-ов), Штыревой Разъем, Серия Micro-Fit для поверхностного монтажа", Value1={Value1}, Value2={Value2}, Value3=Корпус, Part Number=Molex_430450218, System=Connector, Value4=Корпус
XP8 XP9: library part Molex_430450418, "Разъем типа провод-плата, 3 мм, 4 контакт(-ов), Штыревой Разъем, для поверностного монтажа", Value1={Value1}, Value2={Value2}, Value3={Value3}, Value4={Value4}, Part Number=Molex_430450418, System=Connector

## Via types
v1: diameter 1, hole 0.5, Top Layer to Bottom Layer, tented both sides, 308 vias

## Nets (pads, with @x,y where several pads share a name; then routed paths per layer and width w, separated by ;. In a path a pad name is that pad's centre, name@x,y a point inside that pad or via, vN(x,y) a via of type N, cw(c..) or ccw(c..) an arc to the next point about the centre after c; other vN are vias at no path point)
+5В: C4.2 C5.1 DD2.4 DD2.8 DD3.14 R7.2 R9.2 R10.2 XP3.35 XP3.36 XP3.37 XP6.13 XP6.14 XP6.15 | length 109.6
  Top Layer w0.35: XP3.37 74.62,17.3 74.62,20.47 R7.2
  Layer 2 w0.35: 93.3,54 v1(94.5,54)
  Layer 2 w1: XP3.37 XP3.35 XP3.36 72.05,13.172 73.152,12.07 81.57,12.07 93.3,23.8 93.3,54 93.3,61.7 90.11,64.89 XP6.14 XP6.13 XP6.15
  Bottom Layer w0.35: XP6.14@88.279,64.881 90.3,64.881 90.919,65.5 92.95,65.5 93.005,65.445 94.48,65.445 94.595,65.33 DD2.4 94.595,65.925 97.18,68.51 98.39,68.51 ; C5.1 92.015,56.935 93.348,56.935 93.44,56.843 93.44,55.236 94.5,54.176 v1(94.5,54) ; DD2.8@98.39,70.46 98.39,68.51 ; R9.2 R10.2 99.91,68.51 98.39,68.51
+12В: R6.2 XP3.38 XP3.39 XP3.40 XP6.19 XP6.20 XP6.21 | length 65.6
  Top Layer w0.35: XP3.39 77.13,18.705 78.85,20.425 R6.2
  Layer 2 w1: XP3.38 XP3.40 XP3.39 83.52,17.27 91,24.75 91,56.078 89.808,57.27 88.27,57.27 86.1,57.27 XP6.19 XP6.21@85.73,54.73
+12В_servo: R5.2 XP6.32 XP6.33 XP6.34 XP6.35 XP6.36 XP6.37 XP6.38 XP6.40 XP8.1 XP9.1 | length 7.4
  Top Layer w0.35: R5.2 90.5,58.165 92.665,56 XP8.1
+24В: VD5.2 VT5.3 VT6.3 VT7.3 VT8.3 XP3.1 XP3.2 XP3.3 XP3.4 XP3.5 XP3.6 XP3.7 XP3.8 XP6.26 XP6.27 XP6.28 XP6.29 XP6.30 XP6.31 | length 136.3
  Bottom Layer w1.8: XP3.6 33.95,12.15 35.3,10.8 80,10.8 91.65,22.45 91.65,26.926 91.6,26.976 91.6,29.926 91.6,41.74 88.771,44.57 XP6.30
  Bottom Layer w2.5: v1(7,50.25) v1(7,49) 7,37.821 14.75,30.071 14.75,23.179 20.659,17.27 XP3.1
  other v1: 5.75,49 5.75,50.25 5.75,51.5 7,51.5 7,52.75 7,54 8.25,54.5 9,55.5 9,56.75 10.25,57.25 11.5,57.25 9,58.5 10.25,58.5 9,59.75 10.25,59.75
+24В_АКБ1: VT1_1.5 VT1_1.6 VT1_1.7 VT1_1.8 VT1_2.5 VT1_2.6 VT1_2.7 VT1_2.8 VT2_1.5 VT2_1.6 VT2_1.7 VT2_1.8 VT2_2.5 VT2_2.6 VT2_2.7 VT2_2.8 VT3.3 VT5.2 XP4.P | length 8
  Top Layer w0.35: VT3.3 5.411,60.661 7.034,62.284 7.034,63.544 VT5.2
  other v1: 17,59 19,59 21,59 23,59 25,59 27,59 29,59 65,59 16,61 18,61 20,61 22,61 24,61 26,61 28,61 30,61 40,61 42,61 44,61 46,61 48,61 50,61 52,61 54,61 56,61 68,61 25,63 27,63 29,63 41,63 43,63 45,63 47,63 49,63 51,63 53,63 55,63 65,63 67,63 24,65 26,65 28,65 30,65 25,67 27,67 24,69 46,69 48,69 50,69 39,71 45,71 47,71 49,71 51,71 57,71 63,71
+24В_АКБ2: VT1_3.5 VT1_3.6 VT1_3.7 VT1_3.8 VT1_4.5 VT1_4.6 VT1_4.7 VT1_4.8 VT1_5.5 VT1_5.6 VT1_5.7 VT1_5.8 VT2_3.5 VT2_3.6 VT2_3.7 VT2_3.8 VT2_4.5 VT2_4.6 VT2_4.7 VT2_4.8 VT2_5.5 VT2_5.6 VT2_5.7 VT2_5.8 VT4.3 VT6.2 XP5.P | length 10.1
  Top Layer w0.35: VT6.2 10.985,42.99 11.498,43.502 VT4.3 ; XP5.P@17.911,47.589 XP5.P
  other v1: 24,45 26,45 25,47 27,47 33,47 37,47 39,47 47,47 49,47 51,47 57,47 61,47 63,47 71,47 73,47 75,47 24,49 26,49 46,49 48,49 50,49 70,49 72,49 74,49 25,51 27,51 29,51 31,51 33,51 35,51 79,51 16,53 18,53 20,53 22,53 24,53 26,53 28,53 30,53 32,53 34,53 36,53 42,53 44,53 46,53 48,53 50,53 52,53 54,53 56,53 58,53 60,53 66,53 17,55 19,55 21,55 23,55 25,55 27,55 29,55 31,55 43,55 45,55 47,55 49,55 51,55 53,55 55,55 65,55 69,55 71,55 73,55 77,55 70,57 72,57 71,59 73,59 79,59 80,61
+35В: C1_1.2 C1_2.2 C1_3.2 C1_4.2 C1_5.2 DD1_1.6 DD1_2.6 DD1_3.6 DD1_4.6 DD1_5.6 XP6.1 XP6.2 | length 133.5
  Bottom Layer w0.35: 35.365,65.8 DD1_1.6 ; DD1_4.6 36.635,50.635 ; 59.365,66.115 DD1_2.6 ; DD1_5.6 60.635,51.135 ; 74.635,59.365 DD1_3.6 ; DD1_3.6@76.7,59.365 78.2,57.865 C1_3.2
  Bottom Layer w0.75: C1_1.2 35.365,65.8 C1_2.2 ; 36.635,50.635 37.2,51.2 C1_4.2 50.88,51.2 60.7,51.2 ; C1_2.2@56,66 59.25,66 ; 59.365,66.115 59.25,66 ; 60.635,51.135 60.7,51.2 ; 74.625,59.375 74.635,59.365 ; XP6.2@88.27,80.13 XP6.1 83.6,78 83.6,67.172 82.428,66 74.6,66 ; 59.25,66 74.6,66 ; 60.7,51.2 C1_5.2 73.609,51.2 74.6,52.191 74.6,66
button: DD2.2 R9.1 XP7.1 | length 10.5
  Top Layer w0.35: XP7.1 101.29,71 101.75,70.54 v1(101.75,69.5)
  Bottom Layer w0.35: DD2.2 97.135,65.865 97.545,66.275 99.825,66.275 R9.1 100.225,66.325 100.542,66.325 101.75,67.533 v1(101.75,69.5)
DSHOT1_1: XP1_1.2 XP3.13 | length 115.3
  Layer 1 w0.35: XP1_1.2 40.835,87 39.597,85.762 39.512,85.762 37.25,83.5 37.25,74.5 33.75,71 14.25,71 13.25,70 13.25,33.25 16.25,30.25 22,30.25 31.25,21 40.38,21 XP3.13
DSHOT1_2: XP1_2.2 XP3.27 | length 95.8
  Layer 1 w0.35: XP3.27 65.37,20.75 79,20.75 83,24.75 83,66 75.025,73.975 74.325,73.975 73.725,74.575 73.725,75.025 72.75,76 72.75,83.5 69.25,87 XP1_2.2
DSHOT1_3: XP1_3.2 XP3.29 | length 90
  Layer 1 w0.35: XP3.29 66.91,19.75 79.25,19.75 83.95,24.45 83.95,66.55 75.775,74.725 75.775,75.425 73.975,77.225 73.975,82.175 77.8,86 XP1_3.2
DSHOT1_4: XP1_4.2 XP3.15 | length 23.2
  Layer 1 w0.35: XP1_4.2 30,31.25 39,22.25 41.67,22.25 XP3.15
DSHOT1_5: XP1_5.2 XP3.19 | length 16.5
  Layer 1 w0.35: XP3.19 50.75,18.25 50.75,28.75 XP1_5.2
DSHOT2_1: XP2_1.2 XP3.11 | length 99.6
  Layer 1 w0.35: XP2_1.2 29.8,84 23.785,77.985 23.785,75.035 21,72.25 13.75,72.25 12,70.5 12,58.2 12.525,57.675 12.525,56.825 12,56.3 12,32.5 15.5,29 21,29 30.25,19.75 39.09,19.75 XP3.11
DSHOT2_2: XP2_2.2 XP3.25 | length 107.8
  Layer 1 w0.35: XP2_2.2 58,87 61,84 61,75.75 62.5,74.25 73.05,74.25 82,65.3 82,25.25 78.5,21.75 63.83,21.75 XP3.25
DSHOT2_3: XP2_3.2 XP3.23 | length 27.3
  Layer 1 w0.35: XP3.23 62.29,22.75 68.75,22.75 XP2_3.2
DSHOT2_4: XP2_4.2 XP3.17 | length 17.7
  Layer 1 w0.35: XP2_4.2 49.19,24.81 XP3.17
DSHOT2_5: XP2_5.2 XP3.21 | length 19.6
  Layer 1 w0.35: XP3.21 54.27,20.27 XP2_5.2
enable: DD1_1.2 DD1_1.4 DD1_2.2 DD1_2.4 DD1_3.2 DD1_3.4 DD1_4.2 DD1_4.4 DD1_5.2 DD1_5.4 DD3.5 R8.2 XP6.39 | length 167.6
  Top Layer w0.35: R8.2 100.575,64.85 100.8,64.625 100.8,64.55 101.133,64.217 v1(101.133,63.216)
  Layer 1 w0.35: v1(73.25,52.75) v1(76.775,52.75) ; XP6.39 85.73,30.77 86.5,30 92.75,30 94.825,32.075 94.825,32.725 v1(94.85,32.75)
  Bottom Layer w0.35: DD1_1.4 34.095,59.405 34.81,58.69 35.45,58.69 ; DD1_4.2 35.365,58.605 35.45,58.69 ; DD1_1.2 36.635,58.805 36.75,58.69 ; DD1_4.4 37.905,58.595 38,58.69 ; 58.095,58.69 38,58.69 ; DD1_2.4 58.095,58.583 59.365,58.583 ; DD1_5.2 59.365,58.583 ; DD1_2.2 60.635,58.698 60.75,58.583 ; DD1_5.4 61.905,58.405 62.083,58.583 ; v1(73.25,52.75) 69.25,52.75 63.417,58.583 62.083,58.583 ; v1(76.775,52.75) 83.5,52.75 ; DD1_3.4 83.405,58.095 ; DD1_3.2 82.955,60.635 83.5,60.09 83.5,58.19 83.405,58.095 ; XP6.39 83.5,34.1 83.5,52.75 ; v1(94.85,32.75) 102,39.9 102,62.361 101.145,63.216 v1(101.133,63.216) 100.323,64.025 99.375,64.025 98.52,63.17 DD3.5 ; 35.45,58.69 36.75,58.69 ; 36.75,58.69 38,58.69 ; 59.365,58.583 60.75,58.583 ; 60.75,58.583 62.083,58.583 ; 83.405,58.095 83.5,58 83.5,52.75
GND: C1_1.1 C1_2.1 C1_3.1 C1_4.1 C1_5.1 C2.2 C3.2 C4.1 C5.2 DD1_1.3 DD1_2.3 DD1_3.3 DD1_4.3 DD1_5.3 DD2.1 DD3.7 HL1.2 HL2.2 HL3.2 HL4.2 R1.1 R2.1 R3.1 R4.1 R11.1 VD1_1.1 VD1_2.1 VD1_3.1 VD1_4.1 VD1_5.1 VD2_1.1 VD2_2.1 VD2_3.1 VD2_4.1 VD2_5.1 VD5.1 XP1_1.3 XP1_2.3 XP1_3.3 XP1_4.3 XP1_5.3 XP2_1.3 XP2_2.3 XP2_3.3 XP2_4.3 XP2_5.3 XP3.9 XP3.10 XP3.12 XP3.14 XP3.16 XP3.18 XP3.20 XP3.22 XP3.24 XP3.26 XP3.28 XP3.30 XP3.31 XP3.33 XP4.N XP5.N XP6.3 XP6.4 XP6.5 XP6.6 XP6.7 XP6.8 XP6.9 XP6.10 XP6.11 XP6.12 XP6.16 XP6.17 XP6.18 XP6.22 XP6.23 XP6.24 XP6.25 XP7.0 XP7.2 XP8.0 XP8.3 XP8.4 XP9.0 XP9.3 XP9.4 | length 15.1
  Bottom Layer w0.35: DD1_4.3 36.635,54.3 38.135,52.8 C1_4.1 ; DD1_5.3 60.635,53.819 61.342,53.112 63.613,53.112 63.925,52.8 C1_5.1 ; C1_3.1 79.8,57.865 81.3,59.365 DD1_3.3 ; C5.2 R11.1
  other v1: 40.5,4.5 53.75,4.5 63.75,7.5 104,47 104,53 78.8,54.1 80.9,54.1 23.4,57.5 32,57.5 36.6,57.5 40,57.5 43.5,57.5 63,57.5 66.5,57.75 97.75,58.75 100.25,58.75 103.5,62.5 71.2,63.6
NetC2_1: C2.1 DD2.6 DD2.7 R10.1 | length 9.7
  Bottom Layer w0.35: DD2.6 95.865,69.66 96.275,69.25 96.75,69.25 97.135,69.635 DD2.7 97.135,72.21 C2.1 97.925,72.75 100,70.675 R10.1
NetC3_1: C3.1 DD2.5 | length 2.7
  Bottom Layer w0.35: DD2.5 94.595,72.27 95.075,72.75 C3.1
NetDD1_1_5: DD1_1.5 VD4_1.2 VT2_1.4 | length 15.8
  Top Layer w0.35: v1(26.75,72.75) 28.09,72.75 VT2_1.4
  Bottom Layer w0.35: v1(26.75,72.75) 25.135,72.75 VD4_1.2 25,70.5 27.775,67.725 DD1_1.5
NetDD1_1_7: DD1_1.7 VD3_1.1 VT1_1.4 | length 17.6
  Top Layer w0.35: v1(38.75,75.75) 40.09,75.75 VT1_1.4
  Bottom Layer w0.35: DD1_1.7 36.635,73.635 v1(38.75,75.75) 38.885,75.885 VD3_1.1
NetDD1_2_5: DD1_2.5 VD4_2.2 VT2_2.4 | length 18.4
  Top Layer w0.35: v1(50.75,75.75) VT2_2.4@52.095,75.75
  Bottom Layer w0.35: v1(50.75,75.75) 50.75,75.925 51.51,76.685 57.8,76.685 VD4_2.2 58.095,76.79 DD1_2.5
NetDD1_2_7: DD1_2.7 VD3_2.1 VT1_2.4 | length 18
  Top Layer w0.35: v1(62.75,75.75) 64.09,75.75 VT1_2.4
  Bottom Layer w0.35: DD1_2.7 60.635,73.635 v1(62.75,75.75) 63.885,76.885 VD3_2.1
NetDD1_3_5: DD1_3.5 VD4_3.2 VT2_3.4 | length 22
  Top Layer w0.35: VT2_3.4 79.905,42.85 80.376,42.379 80.376,41.874 v1(80.5,41.75)
  Bottom Layer w0.35: DD1_3.5 75.918,58.095 75.75,57.927 75.75,49.675 82,43.425 82,42.805 81.069,41.874 80.624,41.874 v1(80.5,41.75)
NetDD1_3_7: DD1_3.7 VD3_3.1 VT1_3.4 | length 24.1
  Top Layer w0.35: v1(74.75,75) 74.926,75 75.181,74.745 VT1_3.4
  Layer 1 w0.35: v1(78.5,64.65) v1(78.5,67.35)
  Bottom Layer w0.35: v1(74.75,75) 76.25,73.5 78.5,73.5 ; DD1_3.7 76.7,60.635 78.5,62.435 v1(78.5,64.65) ; v1(78.5,67.35) 78.5,73.5 ; VD3_3.1 82,74.575 81.425,74 81.175,74 80.675,73.5 78.5,73.5
NetDD1_4_5: DD1_4.5 VD4_4.2 VT2_4.4 | length 16.1
  Top Layer w0.35: VT2_4.4 43.905,42.095 v1(44.5,41.5)
  Bottom Layer w0.35: DD1_4.5 41.725,49.275 46,45 46,42.805 44.819,41.624 44.624,41.624 v1(44.5,41.5)
NetDD1_4_7: DD1_4.7 VD3_4.1 VT1_4.4 | length 11.1
  Top Layer w0.35: VT1_4.4 31.905,42.095 v1(32.5,41.5)
  Bottom Layer w0.35: v1(32.5,41.5) 32.624,41.624 32.819,41.624 34,42.805 34,45.75 35.365,47.115 DD1_4.7
NetDD1_5_5: DD1_5.5 VD4_5.2 VT2_5.4 | length 16
  Top Layer w0.35: VT2_5.4 67.905,42.095 v1(68.5,41.5)
  Bottom Layer w0.35: DD1_5.5 65.475,49.275 70,44.75 70,42.805 68.819,41.624 68.624,41.624 v1(68.5,41.5)
NetDD1_5_7: DD1_5.7 VD3_5.1 VT1_5.4 | length 11.1
  Top Layer w0.35: VT1_5.4 55.905,42.095 v1(56.5,41.5)
  Bottom Layer w0.35: v1(56.5,41.5) 56.624,41.624 56.819,41.624 58,42.805 VD3_5.1 58,43.425 58,45.6 59.365,46.965 DD1_5.7
NetDD2_3: DD2.3 DD3.3 | length 3.6
  Bottom Layer w0.35: DD2.3 95.865,64.532 95.98,64.417 DD3.3
NetDD3_1: DD3.1 DD3.4 R11.2 | length 8.7
  Bottom Layer w0.35: R11.2 93.348,61.65 93.44,61.558 93.44,60.195 94.135,59.5 96.555,59.5 97.25,60.195 DD3.4
NetDD3_2: DD3.2 DD3.6 | length 8.4
  Layer 1 w0.35: v1(94.7,63.1) 94.75,63.05 99.75,63.05 v1(99.8,63)
  Bottom Layer w0.35: v1(94.7,63.1) 94.705,63.095 94.705,61.446 DD3.2 ; DD3.6 99.795,61.446 99.795,62.995 v1(99.8,63)
NetHL1_1: HL1.1 R5.1 | length 1.8
  Top Layer w0.35: R5.1 91.85,63.15 HL1.1
NetHL2_1: HL2.1 R6.1 | length 1.8
  Top Layer w0.35: R6.1 HL2.1
NetHL3_1: HL3.1 R7.1 | length 1.8
  Top Layer w0.35: HL3.1 R7.1
NetHL4_1: HL4.1 R8.1 | length 2.1
  Top Layer w0.35: R8.1 102.15,66.15 HL4.1
NetR1_2: R1.2 VT3.1 VT3.2 VT7.1 | length 5.4
  Top Layer w0.35: R1.2 3.542,56.692 5.117,56.692 5.364,56.939 VT7.1@5.364,56.961 ; VT3.1 VT3.2 5.415,58.335 5.415,56.99 VT7.1
NetR2_2: R2.2 VT4.1 VT4.2 VT8.1 | length 6.2
  Top Layer w0.35: VT8.1 VT8.1@10.661,52.086 ; VT4.1 VT4.2 10.585,49.915 10.585,52.01 VT8.1@10.661,52.086 ; R2.2 12.425,52.35 12.161,52.086 VT8.1@10.661,52.086
NetR3_2: R3.2 VT5.1 VT7.2 | length 6.4
  Top Layer w0.35: R3.2 VT7.2@5.15,54.82 ; VT7.2 5.581,55.251 5.581,55.581 6.281,56.281 6.281,56.781 7.21,57.71 VT5.1
NetR4_2: R4.2 VT6.1 VT8.2 | length 6.7
  Top Layer w0.35: VT6.1 8.79,50.57 9.719,51.499 9.719,52.719 10.419,53.419 10.419,53.749 10.737,54.067 10.737,55.387 R4.2
NetVD1_1_2: VD1_1.2 VD4_1.1 VT2_1.1 VT2_1.2 VT2_1.3 XP2_1.1
  other v1: 33,74.25 34.25,74.5 29.25,75.25 30.5,75.25 31.75,75.25 33,75.5 34.25,75.75 33,76.75 34.25,77 27,77.25 33,78 34.25,78.25 27,78.5 33,79.25 34.25,79.5 27,79.75 33.25,80.5
NetVD1_2_2: VD1_2.2 VD4_2.1 VT2_2.1 VT2_2.2 VT2_2.3 XP2_2.1
  other v1: 53.25,78.25 54.5,78.25 55.75,78.25 51,80.25 51,81.5 51,82.75 58,83 57,83.5
NetVD1_3_2: VD1_3.2 VD4_3.1 VT2_3.1 VT2_3.2 VT2_3.3 XP2_3.1
  other v1: 75,36.75 75,38 73.75,39 75,39.25 73.75,40.25 75,40.5 76.25,40.75 77.5,40.75 78.75,40.75 73.75,41.5 75,41.75
NetVD1_4_2: VD1_4.2 VD4_4.1 VT2_4.1 VT2_4.2 VT2_4.3 XP2_4.1
  other v1: 38.75,35.5 45,36.25 38.75,36.75 38.75,38 37.75,39 39,39.25 37.75,40.25 39,40.5 40.25,40.75 41.5,40.75 42.75,40.75 37.75,41.5 39,41.75
NetVD1_5_2: VD1_5.2 VD4_5.1 VT2_5.1 VT2_5.2 VT2_5.3 XP2_5.1
  other v1: 62.75,35.5 69,36.25 62.75,36.75 62.75,38 61.75,39 63,39.25 61.75,40.25 63,40.5 64.25,40.75 65.5,40.75 66.75,40.75 61.75,41.5 63,41.75
NetVD2_1_2: VD2_1.2 VD3_1.2 VT1_1.1 VT1_1.2 VT1_1.3 XP1_1.1
  other v1: 41.25,78.25 42.5,78.25 43.75,78.25 45,78.25 46.25,78.25 39,80.25 39,81.5 45,82.25 46.25,82.5 39,82.75 45.25,83.5
NetVD2_2_2: VD2_2.2 VD3_2.2 VT1_2.1 VT1_2.2 VT1_2.3 XP1_2.1
  other v1: 65.25,78.25 66.5,78.25 67.75,78.25 63,80.25 63,81.5 63,82.75 70,83 69,83.75
NetVD2_3_2: VD2_3.2 VD3_3.2 VT1_3.1 VT1_3.2 VT1_3.3 XP1_3.1
  other v1: 77.25,77.25 78.5,77.25 79.75,77.25 81,77.25 82.25,77.25 75,79.25 75,80.5 81,81.25 82.25,81.5 75,81.75 81.25,82.5
NetVD2_4_2: VD2_4.2 VD3_4.2 VT1_4.1 VT1_4.2 VT1_4.3 XP1_4.1
  other v1: 26.75,35.5 33,36.25 26.75,36.75 26.75,38 25.75,39 27,39.25 25.75,40.25 27,40.5 28.25,40.75 29.5,40.75 30.75,40.75 25.75,41.5 27,41.75
NetVD2_5_2: VD2_5.2 VD3_5.2 VT1_5.1 VT1_5.2 VT1_5.3 XP1_5.1
  other v1: 50.75,35.5 57,36.25 50.75,36.75 50.75,38 49.75,39 51,39.25 49.75,40.25 51,40.5 52.25,40.75 53.5,40.75 54.75,40.75 49.75,41.5 51,41.75
PWM1: XP3.32 XP8.2 | length 72.5
  Top Layer w0.35: XP3.32 66.97,12.78 68.25,11.5 80.75,11.5 92,22.75 92,33 96.4,37.4 96.4,57.6 95,59 XP8.2
PWM2: XP3.34 XP9.2 | length 51.8
  Top Layer w0.35: XP3.34 69.51,13.49 70.25,12.75 80.301,12.75 91,23.449 91,33.75 95.5,38.25 95.5,43.59 95.09,44 XP9.2
pads on no net: DD1_1.1 DD1_1.8 DD1_2.1 DD1_2.8 DD1_3.1 DD1_3.8 DD1_4.1 DD1_4.8 DD1_5.1 DD1_5.8 DD3.8 DD3.9 DD3.10 DD3.11 DD3.12 DD3.13 XP6.NC

## Polygon pours and split planes (outlines as drawn)
GND on Top Layer "GND_TOP_THRL" (solid, remove dead copper, pour order 78): 0.008,53.007 ccw(c53.008,53.007) 53.008,0.007 ccw(c53.008,53.007) 106.008,53.007 ccw(c53.008,53.007) 53.008,106.007 ccw(c53.008,53.007)
+24В_АКБ2 on Top Layer "NONET_L-01_P-001" (solid, pour order 1): 14.5,53.5 17.5,56.5 67.5,56.5 72.5,61.5 72.5,73 73.5,73 81.5,73 81.5,45 27,45 23,41 10.5,41 9.5,40 3.5,40 3.5,46 4,46.5 13,46.5 14.5,48
+24В on Top Layer "NONET_L-01_P-001" (solid, pour order 14): 8.5,58 8.5,60.75 12.25,60.75 12.25,56.5 10.25,56.5 9.75,56 9.75,51.75 8.25,51.75 7.75,51.25 7.75,48.25 3.75,48.25 3.75,51 4.5,51 6.25,52.75 6.25,55.75
NetVD1_5_2 on Top Layer "NONET_L-01_P-001" (solid, pour order 11): 69.5,39.5 69.5,35.75 68.5,34.75 62.25,34.75 61,36 61,41.75 63.5,44.25 67.25,44.25 67.25,41.75
+24В on Top Layer "24V_VD" (solid, pour order 67): 34,13.5 34.5,13 34.5,9.75 34.75,9.5 37.25,9.5 37.5,9.75 37.5,13.75 37.75,14 37.75,18 37.25,18.5 28,18.5 27.5,18 27.5,14 28,13.5
+24В_АКБ1 on Top Layer "NONET_L-01_P-001" (solid, pour order 0): 7,69.5 13.75,69.5 15.25,71 32.5,71 35.5,74 70,74 70,61.5 67,58.5 16,58.5 11.75,62.75 6.5,62.75 6.5,69
NetVD2_3_2 on Top Layer "NONET_L-01_P-001" (solid, pour order 7): 74.5,78.5 74.5,82.25 75.5,83.25 81.75,83.25 83,82 83,76.25 80.5,73.75 76.75,73.75 76.75,76.25
NetVD2_2_2 on Top Layer "NONET_L-01_P-001" (solid, pour order 6): 62.5,79.5 62.5,83.25 63.5,84.25 69.75,84.25 71,83 71,77.25 68.5,74.75 64.75,74.75 64.75,77.25
NetVD1_2_2 on Top Layer "NONET_L-01_P-001" (solid, pour order 5): 50.5,79.5 50.5,83.25 51.5,84.25 57.75,84.25 59,83 59,77.25 56.5,74.75 52.75,74.75 52.75,77.25
NetVD2_1_2 on Top Layer "NONET_L-01_P-001" (solid, pour order 4): 38.5,79.5 38.5,83.25 39.5,84.25 45.75,84.25 47,83 47,77.25 44.5,74.75 40.75,74.75 40.75,77.25
NetVD1_1_2 on Top Layer "NONET_L-01_P-001" (solid, pour order 18): 26.5,76.5 26.5,80.25 27.5,81.25 33.75,81.25 35,80 35,74.25 32.5,71.75 28.75,71.75 28.75,74.25
+12В_servo on Top Layer "12V_SERVO_CON" (solid, pour order 20): 92,45.5 92.5,46 92.5,53.5 93.75,54.75 94.75,54.75 95.25,55.25 95.25,57 94.75,57.5 91.5,57.5 89.75,55.75 89.75,44 88.25,42.5 88.25,38.25 89,38.25 90.5,39.75 94.75,39.75 95,40 95,42 94.25,42.75 91.945,42.75 91.68,43.015 91.68,45.18
+12В_servo on Top Layer "12V_SERVO_DC" (solid, pour order 19): 87,31.25 87.75,30.5 88.75,30.5 89.5,31.25 89.5,42.75 89,43.25 87.5,43.25 87,42.75 87,41 86.75,40.75 85,40.75 84.5,40.25 84.5,33.75 85,33.25 86.75,33.25 87,33
NetVD1_3_2 on Top Layer "NONET_L-01_P-001" (solid, pour order 12): 81.5,39.5 81.5,35.75 80.5,34.75 74.25,34.75 73,36 73,41.75 75.5,44.25 79.25,44.25 79.25,41.75
NetVD2_5_2 on Top Layer "NONET_L-01_P-001" (solid, pour order 10): 57.25,39.5 57.25,35.75 56.25,34.75 50,34.75 48.75,36 48.75,41.75 51.25,44.25 55,44.25 55,41.75
NetVD1_4_2 on Top Layer "NONET_L-01_P-001" (solid, pour order 9): 45.5,39.5 45.5,35.75 44.5,34.75 38.25,34.75 37,36 37,41.75 39.5,44.25 43.25,44.25 43.25,41.75
NetVD2_4_2 on Top Layer "NONET_L-01_P-001" (solid, pour order 8): 33.5,39.5 33.5,35.75 32.5,34.75 26.25,34.75 25,36 25,41.75 27.5,44.25 31.25,44.25 31.25,41.75
GND on Bottom Layer "GND_BOT_THRL" (solid, remove dead copper, pour order 91): 0.008,53.007 ccw(c53.008,53.007) 53.008,0.007 ccw(c53.008,53.007) 106.008,53.007 ccw(c53.008,53.007) 53.008,106.007 ccw(c53.008,53.007)
NetVD1_5_2 on Bottom Layer "NONET_L-01_P-001" (solid, pour order 46): 71,37.25 71,39.75 70.75,40 69,40 67.25,41.75 67.25,44.25 63.5,44.25 59.5,40.25 59.5,36 60.5,35 68.75,35
+24В on Bottom Layer "NONET_L-01_P-001" (solid, pour order 17): 87,43 87.25,43.25 89,43.25 89.5,43.75 89.5,50.25 89,50.75 87.5,50.75 87,50.25 87,48.5 86.75,48.25 85,48.25 84.5,47.75 84.5,41.25 85,40.75 86.5,40.75 87,41.25
NetVD1_3_2 on Bottom Layer "NONET_L-01_P-001" (solid, pour order 47): 83,37.25 83,39.75 82.75,40 81,40 79.25,41.75 79.25,44.25 75.5,44.25 71.5,40.25 71.5,36 72.5,35 80.75,35
NetVD2_5_2 on Bottom Layer "NONET_L-01_P-001" (solid, pour order 45): 59,37.25 59,39.75 58.75,40 57,40 55.25,41.75 55.25,44.25 51.5,44.25 47.5,40.25 47.5,36 48.5,35 56.75,35
NetVD1_4_2 on Bottom Layer "NONET_L-01_P-001" (solid, pour order 44): 47,37.25 47,39.75 46.75,40 45,40 43.25,41.75 43.25,44.25 39.5,44.25 35.5,40.25 35.5,36 36.5,35 44.75,35
NetVD2_3_2 on Bottom Layer "NONET_L-01_P-001" (solid, pour order 43): 82.5,76.25 83,76.75 83,82 81.75,83.25 75.5,83.25 74.75,84 71.75,84 71.25,83.5 71.25,80.5 74.5,77.25 75.5,76.25
NetVD2_2_2 on Bottom Layer "NONET_L-01_P-001" (solid, pour order 42): 70.5,77.25 71,77.75 71,83 69.75,84.25 63.5,84.25 62.75,85 59.75,85 59.25,84.5 59.25,81.5 62.5,78.25 63.5,77.25
NetVD1_2_2 on Bottom Layer "NONET_L-01_P-001" (solid, pour order 41): 58.5,77.25 59,77.75 59,83 57.75,84.25 51.5,84.25 50.75,85 47.75,85 47.25,84.5 47.25,81.5 50.5,78.25 51.5,77.25
NetVD2_1_2 on Bottom Layer "NONET_L-01_P-001" (solid, pour order 40): 46.5,77.25 47,77.75 47,83 45.75,84.25 39.5,84.25 38.75,85 35.75,85 35.25,84.5 35.25,81.5 38.5,78.25 39.5,77.25
NetVD2_4_2 on Bottom Layer "NONET_L-01_P-001" (solid, pour order 39): 35,37.25 35,39.75 34.75,40 33,40 31.25,41.75 31.25,44.25 27.5,44.25 23.5,40.25 23.5,36 24.5,35 32.75,35
NetVD1_1_2 on Bottom Layer "NONET_L-01_P-001" (solid, pour order 30): 27.5,81.25 26.75,82 23.75,82 23.25,81.5 23.25,76 24,75.25 26.5,75.25 28,73.75 28,71.75 32.5,71.75 35,74.25 35,80 33.75,81.25
+24В on Bottom Layer "NONET_L-01_P-001" (solid, pour order 16): 26.75,19 37.75,19 37.75,13.25 26.75,13.25
+24В on Bottom Layer "NONET_L-01_P-001" (solid, pour order 15): 5,48.25 7.75,48.25 8.75,49.25 8.75,53.5 12.75,57.5 12.75,60.75 8,60.75 5,57.75
GND on Layer 1 "GND_MID1_THRL" (solid, remove dead copper, pour order 80): 0.008,53.007 ccw(c53.008,53.007) 53.008,0.007 ccw(c53.008,53.007) 106.008,53.007 ccw(c53.008,53.007) 53.008,106.007 ccw(c53.008,53.007)
+24В_АКБ2 on Layer 1 "NONET_L-01_P-001" (solid, pour order 21): 72.5,63 72.75,63.25 81.5,63.25 81.5,45 27,45 23,41 15,41 14,42 14,53 17.5,56.5 67.5,56.5 72.5,61.5
NetVD1_5_2 on Layer 1 "NONET_L-01_P-001" (solid, pour order 28): 69.5,39.5 69.5,35.75 68.5,34.75 62.25,34.75 61,36 61,41.75 63.5,44.25 67.25,44.25 67.25,41.75
NetVD1_3_2 on Layer 1 "NONET_L-01_P-001" (solid, pour order 27): 81.5,39.5 81.5,35.75 80.5,34.75 74.25,34.75 73,36 73,41.75 75.5,44.25 79.25,44.25 79.25,41.75
NetVD2_3_2 on Layer 1 "NONET_L-01_P-001" (solid, pour order 26): 74.5,78.5 74.5,82.25 75.5,83.25 81.75,83.25 83,82 83,76.25 80.5,73.75 76.75,73.75 76.75,76.25
+24В_АКБ1 on Layer 1 "NONET_L-01_P-001" (solid, pour order 3): 13,70 14.25,71.25 32.75,71.25 35.5,74 70,74 70,61.5 67,58.5 16,58.5 13,61.5
NetVD2_2_2 on Layer 1 "NONET_L-01_P-001" (solid, pour order 25): 62.5,79.5 62.5,83.25 63.5,84.25 69.75,84.25 71,83 71,77.25 68.5,74.75 64.75,74.75 64.75,77.25
NetVD1_2_2 on Layer 1 "NONET_L-01_P-001" (solid, pour order 24): 50.5,79.5 50.5,83.25 51.5,84.25 57.75,84.25 59,83 59,77.25 56.5,74.75 52.75,74.75 52.75,77.25
NetVD2_1_2 on Layer 1 "NONET_L-01_P-001" (solid, pour order 23): 38.5,79.5 38.5,83.25 39.5,84.25 45.75,84.25 47,83 47,77.25 44.5,74.75 40.75,74.75 40.75,77.25
NetVD1_1_2 on Layer 1 "NONET_L-01_P-001" (solid, pour order 22): 26.5,76.5 26.5,80.25 27.5,81.25 33.75,81.25 35,80 35,74.25 32.5,71.75 28.75,71.75 28.75,74.25
NetVD2_4_2 on Layer 1 "NONET_L-01_P-001" (solid, pour order 61): 33.5,39.5 33.5,35.75 32.5,34.75 26.25,34.75 25,36 25,41.75 27.5,44.25 31.25,44.25 31.25,41.75
NetVD1_4_2 on Layer 1 "NONET_L-01_P-001" (solid, pour order 58): 45.5,39.5 45.5,35.75 44.5,34.75 38.25,34.75 37,36 37,41.75 39.5,44.25 43.25,44.25 43.25,41.75
NetVD2_5_2 on Layer 1 "NONET_L-01_P-001" (solid, pour order 29): 57.5,39.5 57.5,35.75 56.5,34.75 50.25,34.75 49,36 49,41.75 51.5,44.25 55.25,44.25 55.25,41.75
GND on Layer 2 "GND_MID2_THRL" (solid, remove dead copper, pour order 82): 0.008,53.007 ccw(c53.008,53.007) 53.008,0.007 ccw(c53.008,53.007) 106.008,53.007 ccw(c53.008,53.007) 53.008,106.007 ccw(c53.008,53.007)

## Keep-outs
Top Layer:
  circle w0.8: c53,103 r3
  circle w0.8: c20,25 r3
  circle w0.8: c9.75,28 r3
  circle w0.8: c20,87 r3
  circle w0.8: c87,87 r3
  circle w0.8: c87,25 r3
  circle w0.8: c96.25,28 r3
Layer 1:
  circle w0.2: c87,25 r2
  circle w0.2: c20,25 r2
  circle w0.2: c9.711,28.008 r2
  circle w0.2: c96.25,28 r2
  circle w0.2: c53,103 r2
  circle w0.2: c87,87 r2
  circle w0.2: c20,87 r2
Layer 2:
  circle w0.2: c9.75,28 r2
  circle w0.2: c20,25 r2
  circle w0.2: c87,25 r2
  circle w0.2: c87,87 r2
  circle w0.2: c20,87 r2
  circle w0.2: c53,103 r2
  circle w0.2: c96.25,28 r2
Bottom Layer:
  circle w0.8: c20,87 r3
  circle w0.8: c53,103 r3
  circle w0.8: c87,87 r3
  circle w0.8: c96.25,28 r3
  circle w0.8: c87,25 r3
  circle w0.8: c20,25 r3
  circle w0.8: c9.75,28 r3

## Silkscreen, mask and mechanical layers (free items; w line width, h text height)
Top Overlay:
  lines w0.2: 41.5,7.5 42,8 41.5,8.5 41.5,7.5 ; 42.5,3.75 42.5,9.25 50.5,9.25 50.5,3.75 42.5,3.75 ; 51,8 51.5,7.5 51.5,8.5 51,8 ; 54.25,5.75 54.75,6.25 54.25,6.75 54.25,5.75 ; 55.25,5.25 55.25,6.25 55.25,9.25 62.5,9.25 62.5,5.25 55.25,5.25 ; 65.25,6.75 65.25,9.25 72,9.25 72,6.75 65.25,6.75 ; 72.5,8 73,7.5 73,8.5 72.5,8 ; 91.25,40.5 91.75,41 91.25,41.5 91.25,40.5 ; 91.25,55.5 91.25,56.5 91.75,56 91.25,55.5 ; 100.25,72.75 100.75,72.25 101.25,72.75 100.25,72.75
  text "BTN" at 92.421,78.199 h2.2
  text "VBAT1 / MARCH" at 5.863,71.635 h2.2
  text "EN" at 100.488,67.517 h1.8
  text "12V SRV" at 90.75,64.587 h1.8
  text "SRV1" at 91.652,49.416 h2.2
  text "SRV2" at 91.517,34.666 h2.2
  text "VBAT2 / LAG+ / VERT" at 6.443,32.338 h2.2
  text "+5V" at 63.741,19.433 h2.2
  text "+12V" at 80.483,15.183 h2.2
  text "THRUSTER" at 42.7,11.7 h1
  text "SERVO" at 55.95,11.7 h1
  text "BUTTON" at 65.95,11.7 h1
  text "PINOUT" at 42.95,10.2 h1
  text "PINOUT" at 55.95,10.2 h1
  text "PINOUT" at 65.95,10.2 h1
  text "+24V" at 43.2,7.45 h1
  text "PWM" at 55.95,7.45 h1
  text "GND" at 59.2,7.45 h1
  text "GND" at 65.95,7.45 h1
  text "EN" at 69.7,7.45 h1
  text "CONTROL" at 43.2,5.95 h1
  text "12V" at 55.95,5.95 h1
  text "GND" at 59.2,5.95 h1
  text "GND" at 43.2,4.45 h1
Mechanical 3:
  circle w0.015: c53.008,53.007 r53
  circle w0.015: c9.706,28.007 r1.5
  circle w0.015: c96.309,28.007 r1.5
  circle w0.015: c53.008,103.007 r1.5